# Altium PCB Mother_board_sauvc_2025.PcbDoc
Units mm, origin at the board's own origin, x right, y up, seen from the top; angles counter-clockwise.
Board outline 92.33 x 96.52 mm, 4 copper layers (Top Layer 1, VCC, GND, Bottom Layer 1), stack 0.603 mm thick; 75 components, 90 nets, 407 pads, 46 vias.
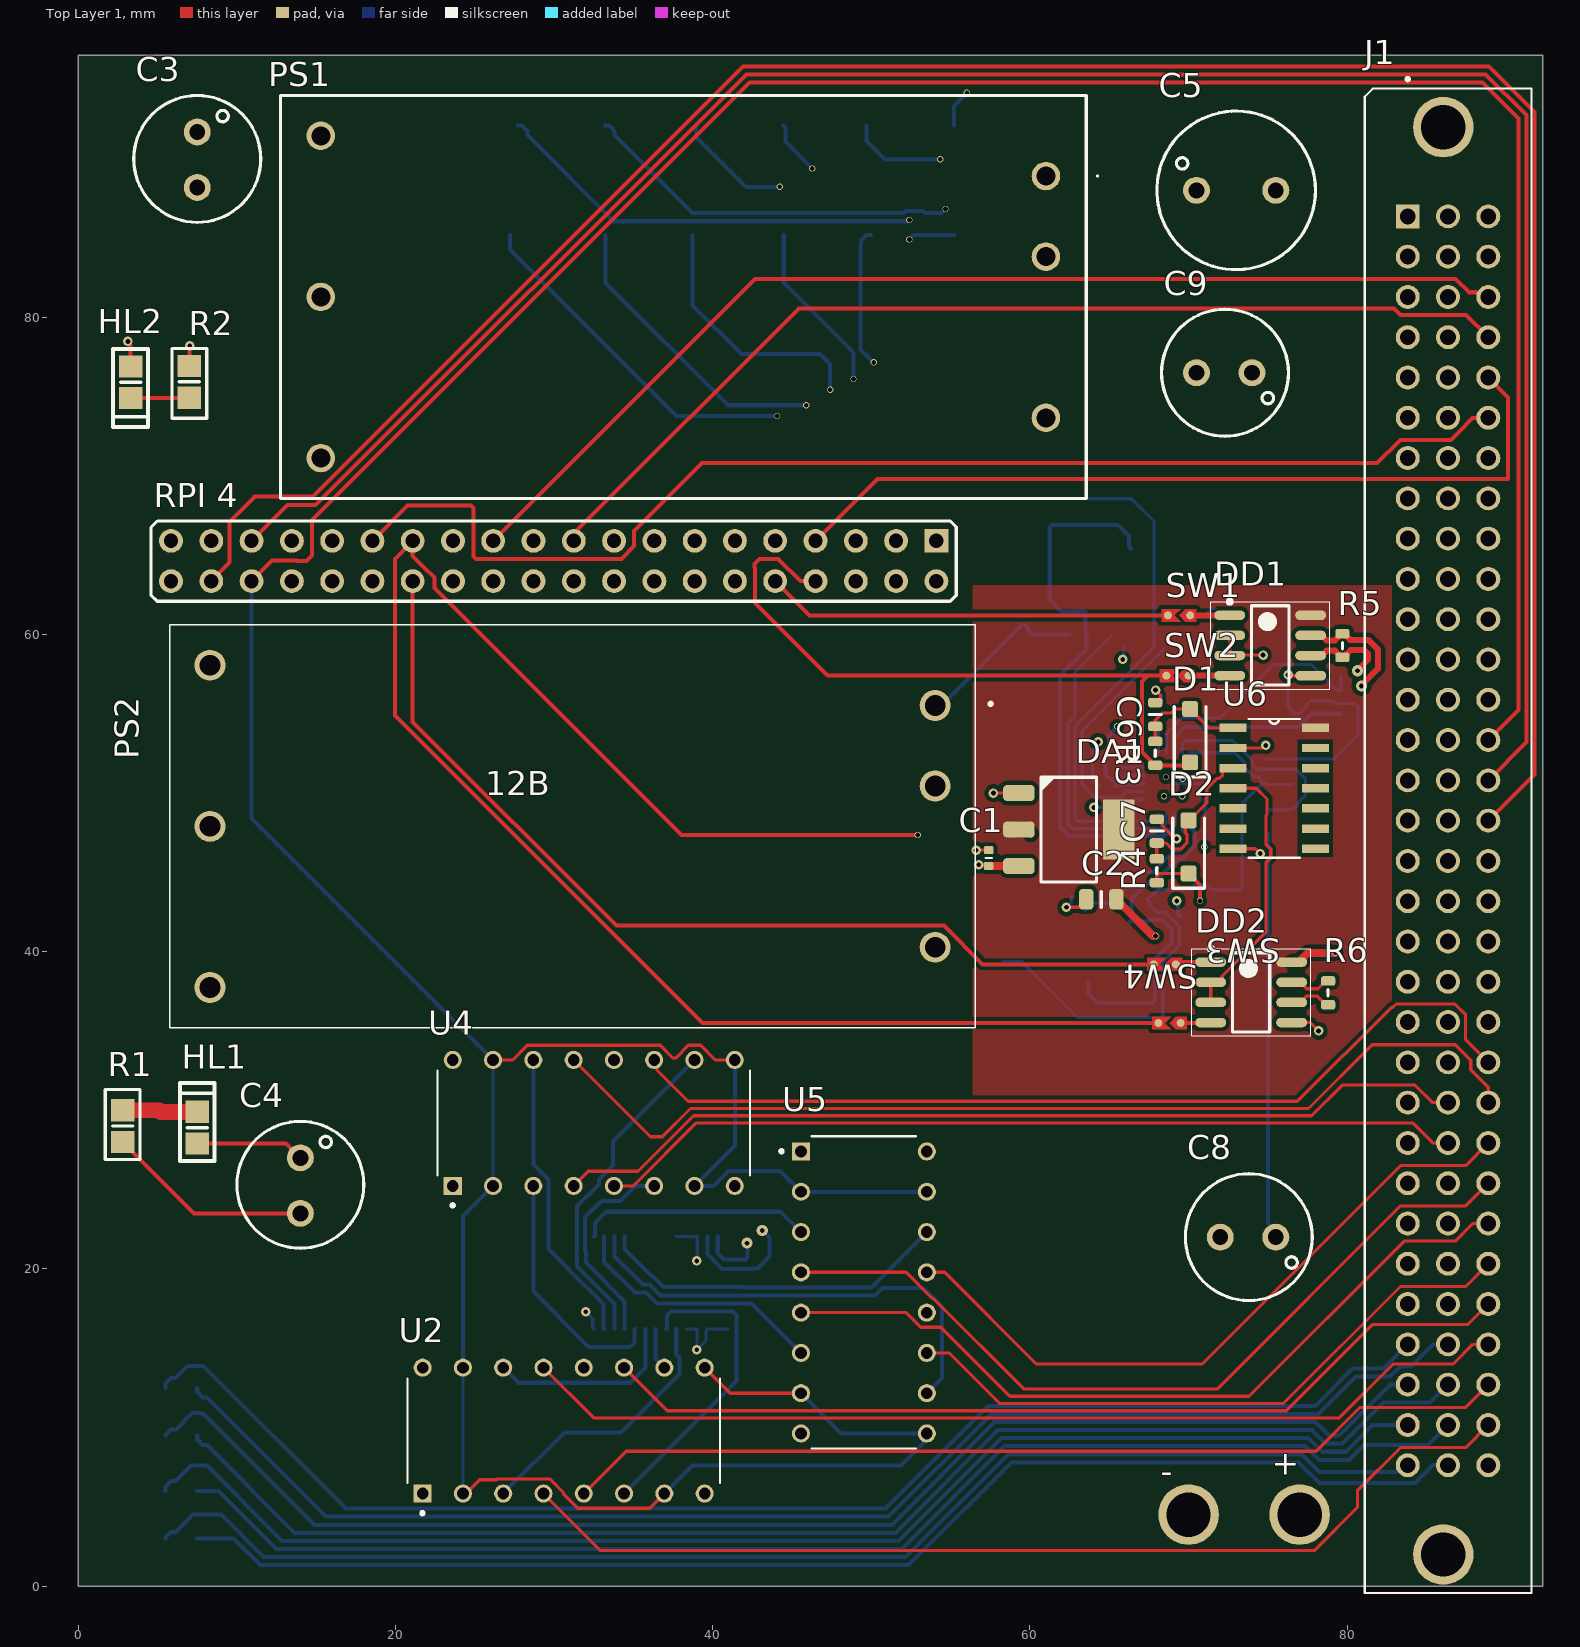
[diagram p0: Top Layer 1 view]
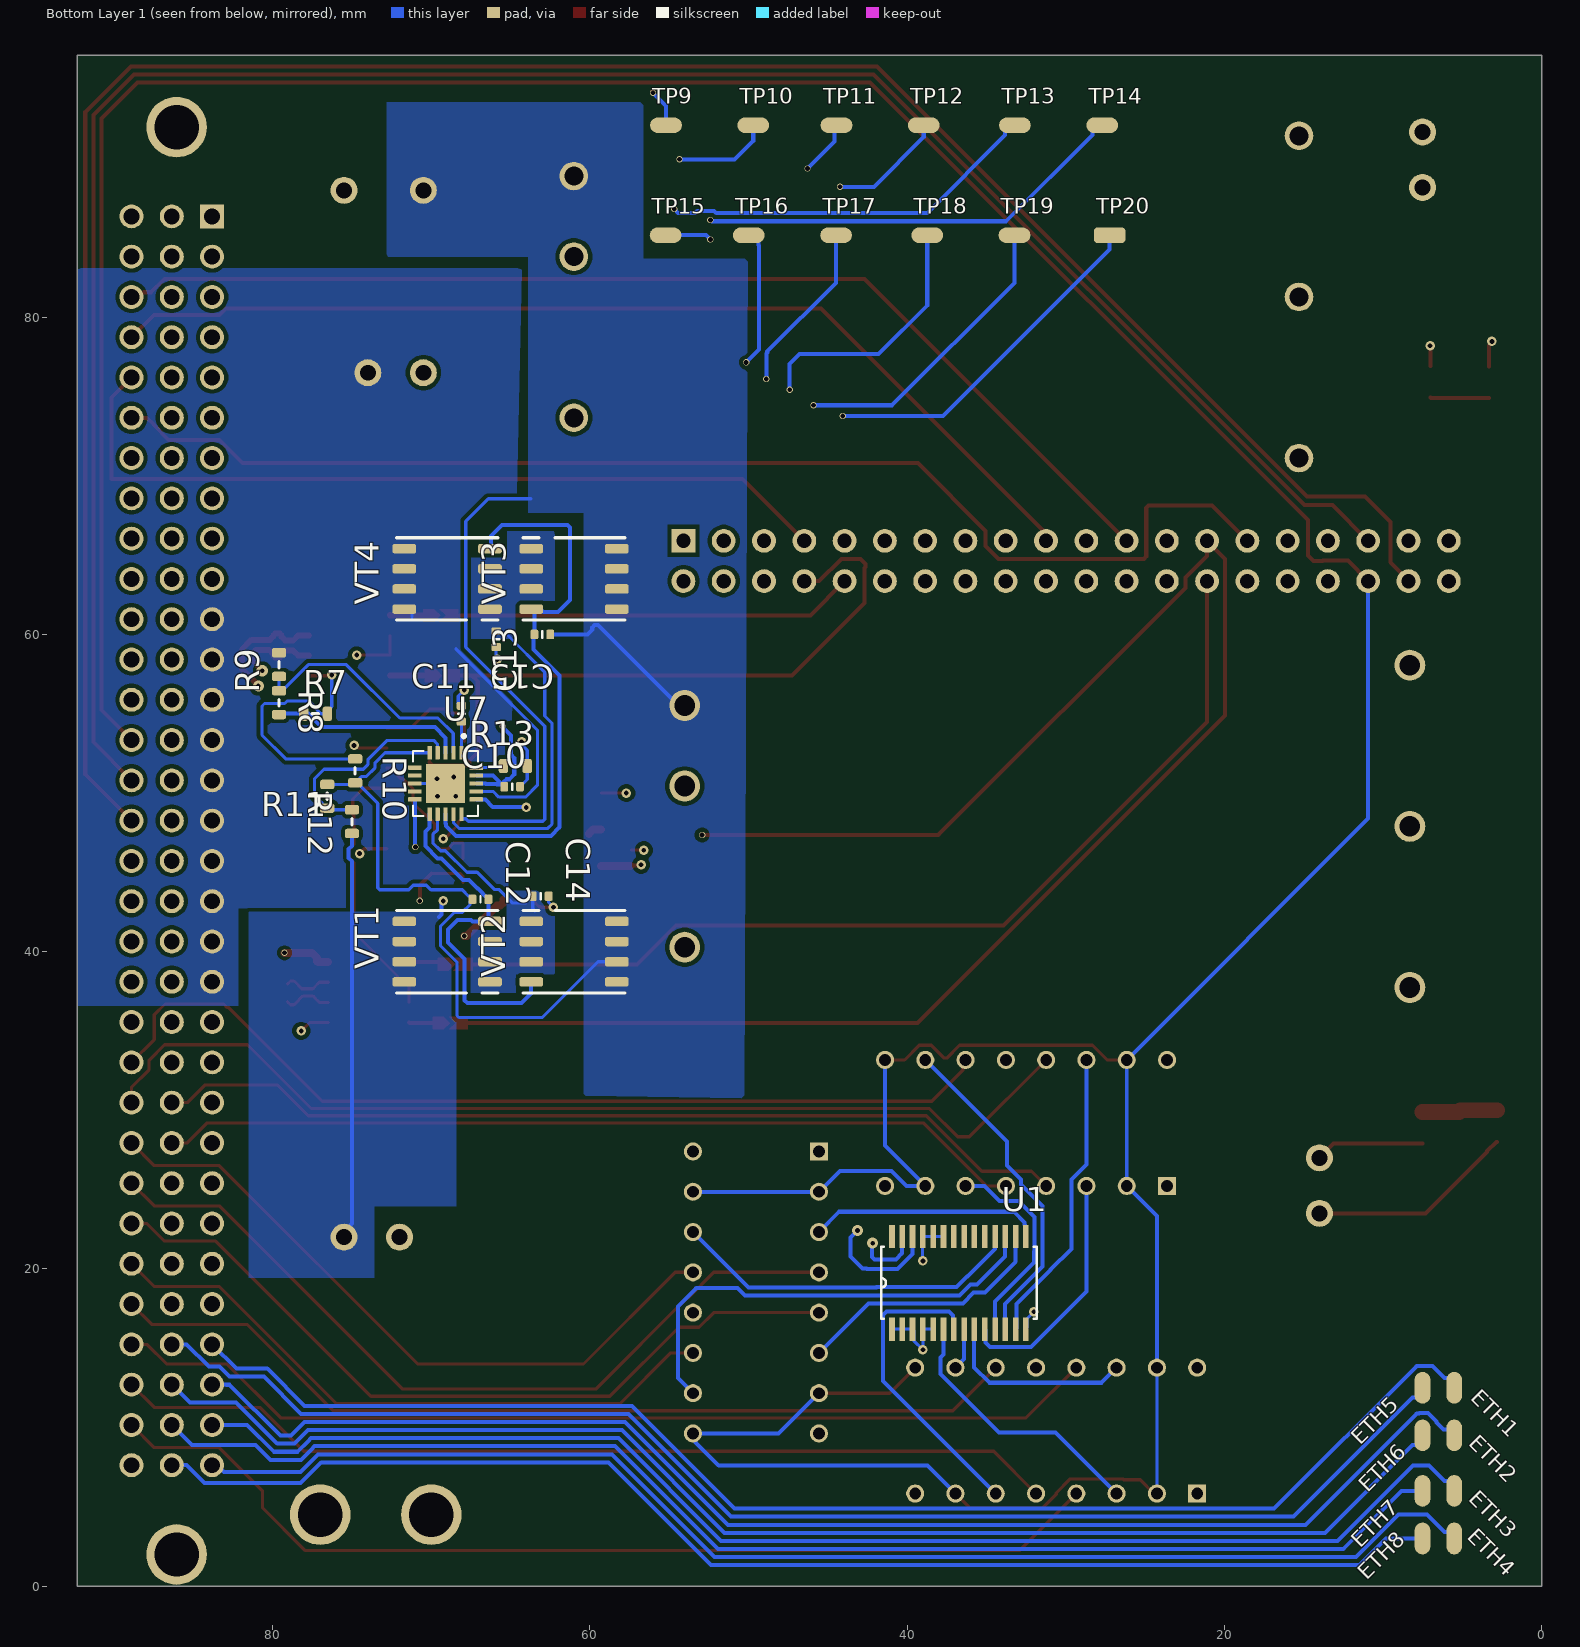
[diagram p1: Bottom Layer 1 view, seen from below]
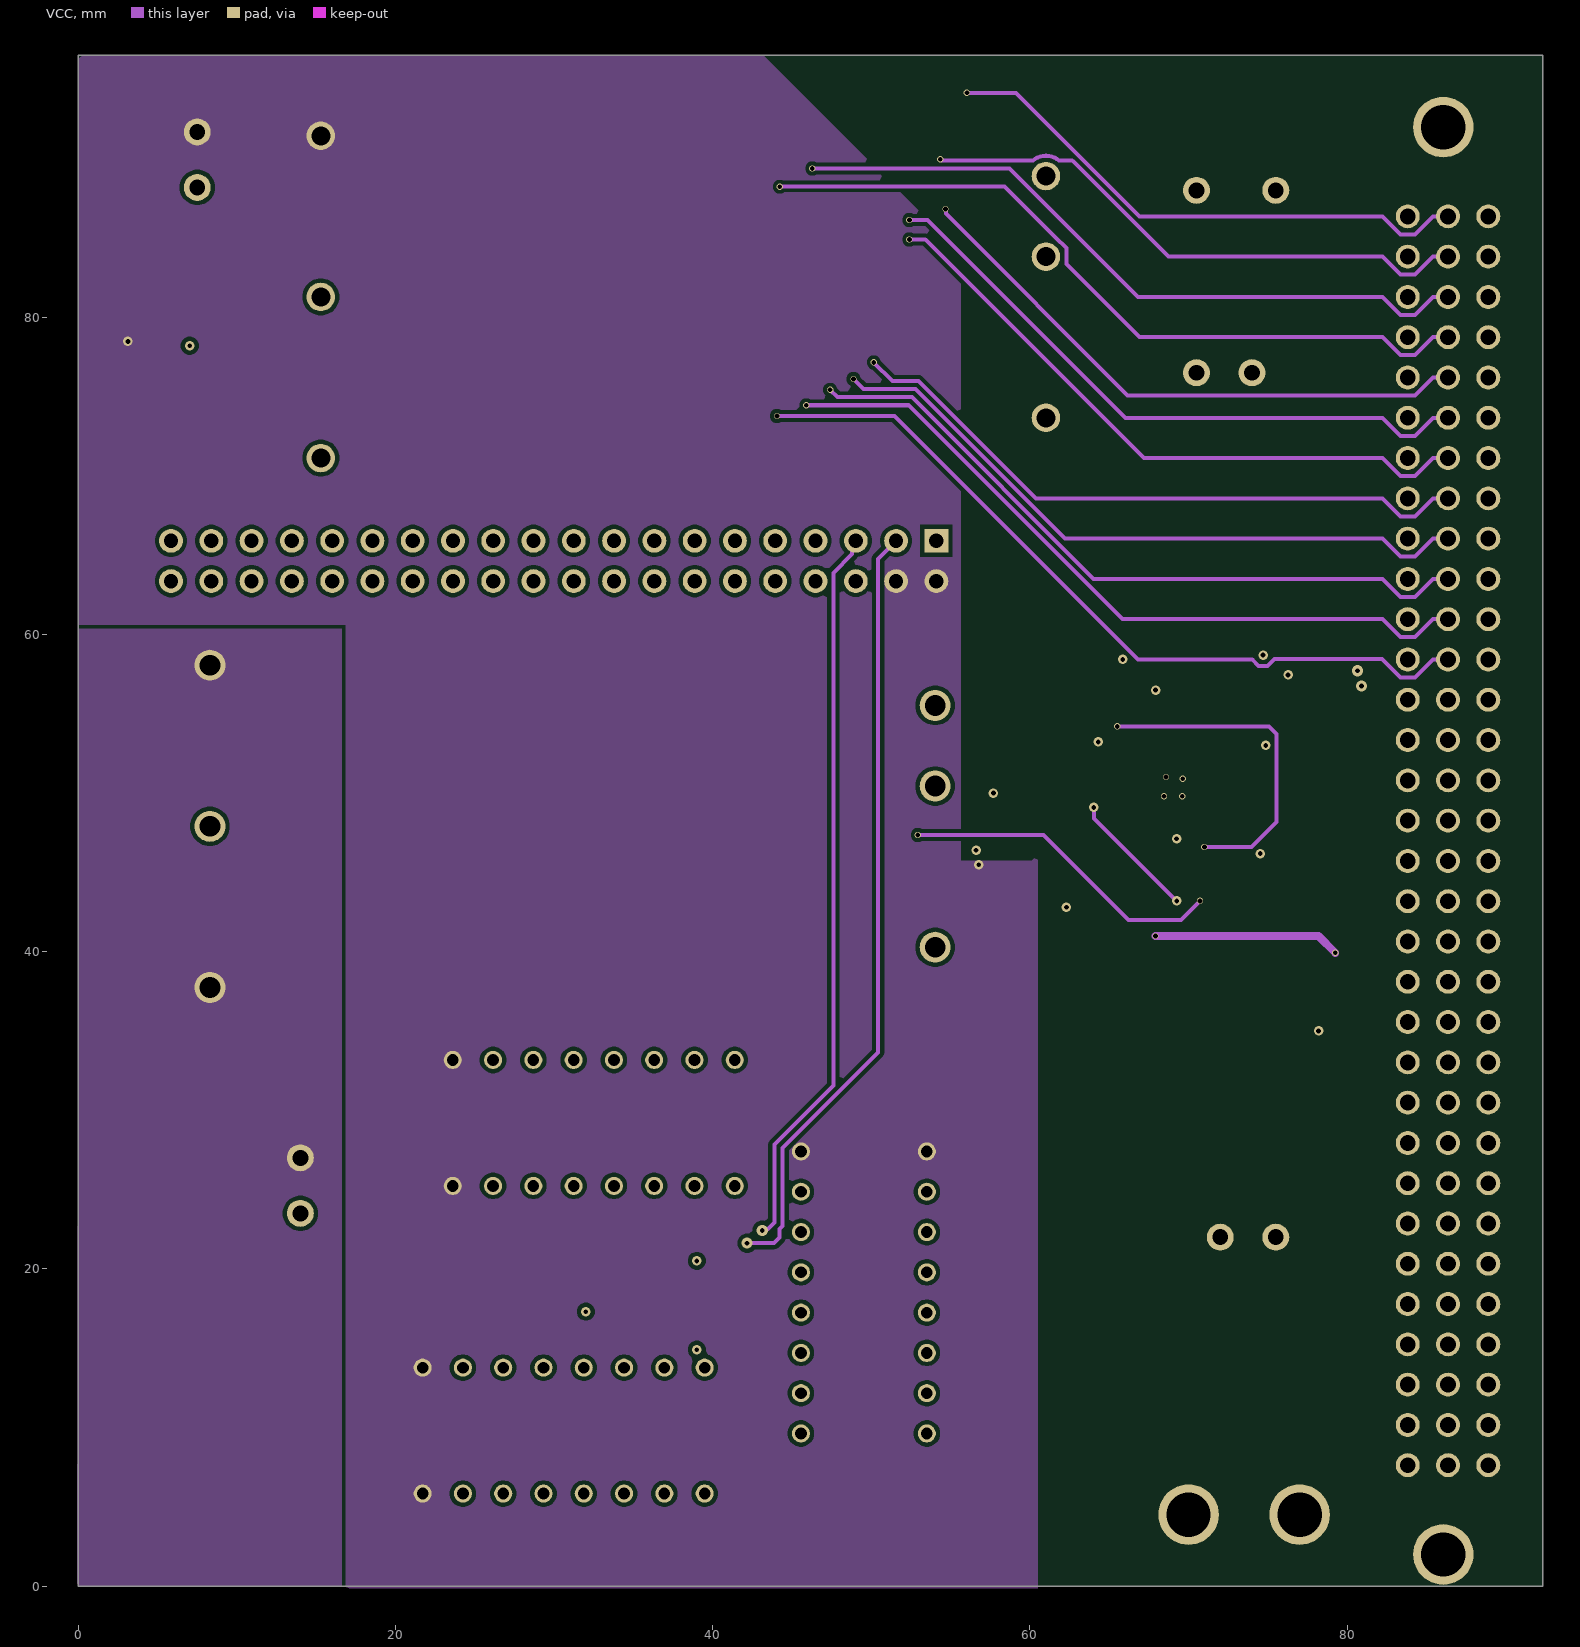
[diagram p2: VCC]
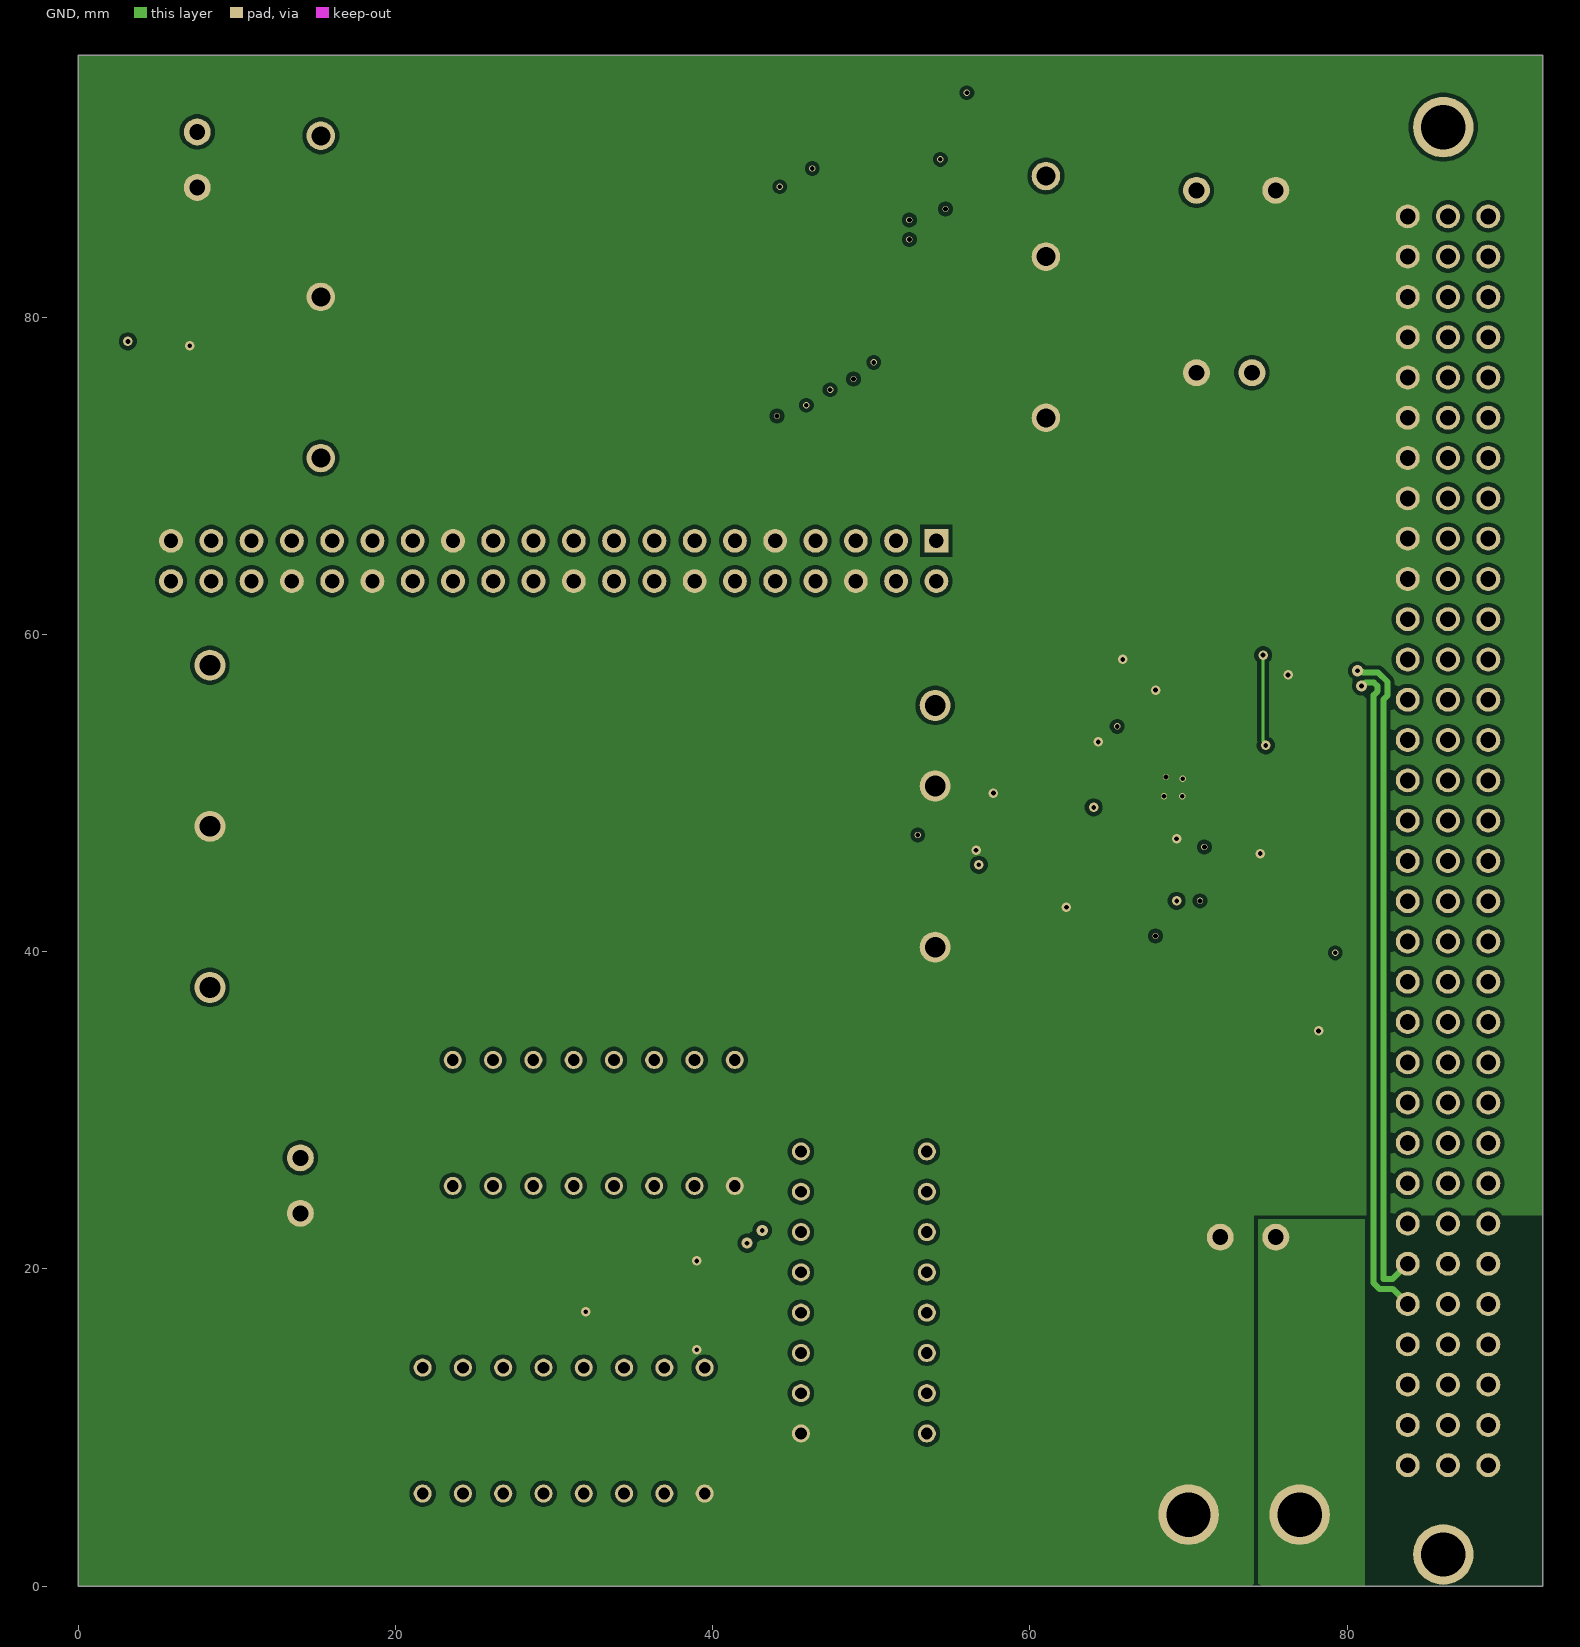
[diagram p3: GND]

## Layer stack, top to bottom
Top Solder: solder mask 0.0102, Solder Resist, Dk 3.5
Top Layer 1: signal copper 0.035
Dielectric 2: prepreg 0.0711, PP-006, Dk 4.1
VCC: signal copper 0.0356
Dielectric 1: dielectric 0.32, FR-4, Dk 4.8
GND: signal copper 0.0356
Dielectric 3: prepreg 0.0711, PP-006, Dk 4.1
Bottom Layer 1: signal copper 0.035
Bottom Solder: solder mask 0.0102, Solder Resist, Dk 3.5

## Board outline
0,0 92.329,0 92.329,96.52 0,96.52

## Design rules (kind name [scope] priority, off if disabled: settings)
Clearance [All] p1: gap=0.254 ignorepadtopadclearanceinfootprint=FALSE
DiffPairsRouting DiffPairsRouting_1 [InDifferentialPair('RS485_2')] p1: maxlimit=0.254 minlimit=0.2 mostfreqgap=0.254 toplayer_minwidth=0.2 toplayer_maxwidth=0.381 toplayer_prefwidth=0.381 midlayer1_minwidth=0.2 midlayer1_maxwidth=0.381 midlayer1_prefwidth=0.381 midlayer2_minwidth=0.2 midlayer2_maxwidth=0.381 midlayer2_prefwidth=0.381 bottomlayer_minwidth=0.2 bottomlayer_maxwidth=0.381 bottomlayer_prefwidth=0.381 maxuncoupledlength=12.7
DiffPairsRouting [InDifferentialPair('RS485')] p2: maxlimit=0.254 minlimit=0.254 mostfreqgap=0.254 toplayer_minwidth=0.381 toplayer_maxwidth=0.381 toplayer_prefwidth=0.381 midlayer1_minwidth=0.381 midlayer1_maxwidth=0.381 midlayer1_prefwidth=0.381 midlayer2_minwidth=0.381 midlayer2_maxwidth=0.381 midlayer2_prefwidth=0.381 bottomlayer_minwidth=0.381 bottomlayer_maxwidth=0.381 bottomlayer_prefwidth=0.381 maxuncoupledlength=12.7
PlaneConnect PlaneConnect_1 [InNetClass('Power')] p1: pad.planeconnectstyle=Direct pad.reliefexpansion=0.508 pad.reliefentries=4 pad.reliefconductorwidth=0.254 pad.reliefairgap=0.254 via.planeconnectstyle=Relief via.reliefexpansion=0.508 via.reliefentries=4 via.reliefconductorwidth=0.254 via.reliefairgap=0.254
PlaneConnect [InNetClass('All Nets')] p2: planeconnectstyle=Direct reliefexpansion=0.508 reliefentries=4 reliefconductorwidth=0.254 reliefairgap=0.254
PolygonConnect PolygonConnect_6 [All vs IsNamedPolygon('NONET_L-01_P-001')] p1: connectstyle=Direct reliefconductorwidth=0.254 reliefentries=4 polygonreliefangle="90 Angle" airgapwidth=0.254
PolygonConnect PolygonConnect_5 [All vs IsNamedPolygon('NONET_L-01_P-001')] p2: connectstyle=Direct reliefconductorwidth=0.254 reliefentries=4 polygonreliefangle="90 Angle" airgapwidth=0.254
PolygonConnect PolygonConnect_4 [All vs IsNamedPolygon('NONET_L-01_P-001')] p3: connectstyle=Direct reliefconductorwidth=0.254 reliefentries=4 polygonreliefangle="90 Angle" airgapwidth=0.254
PolygonConnect PolygonConnect_3 [All vs IsNamedPolygon('NONET_L-01_P-001')] p4: connectstyle=Direct reliefconductorwidth=0.254 reliefentries=4 polygonreliefangle="90 Angle" airgapwidth=0.254
PolygonConnect PolygonConnect_2 [All vs IsNamedPolygon('NONET_L-01_P-001')] p5: connectstyle=Direct reliefconductorwidth=0.254 reliefentries=4 polygonreliefangle="90 Angle" airgapwidth=0.254
PolygonConnect PolygonConnect_1 [All vs IsNamedPolygon('NONET_L01_P000')] p6: thpad.connectstyle=Direct thpad.reliefconductorwidth=0.254 thpad.reliefentries=4 thpad.polygonreliefangle="90 Angle" thpad.airgapwidth=0.254 smdpad.connectstyle=Relief smdpad.reliefconductorwidth=0.254 smdpad.reliefentries=4 smdpad.polygonreliefangle="90 Angle" smdpad.airgapwidth=0.254 via.connectstyle=Direct via.reliefconductorwidth=0.254 via.reliefentries=4 via.polygonreliefangle="90 Angle" via.airgapwidth=0.254
PolygonConnect [All] p7: connectstyle=Relief reliefconductorwidth=0.254 reliefentries=4 polygonreliefangle="90 Angle" airgapwidth=0.254
RoutingTopology [InNetClass('PWM[1..12]')] p1: topology=Starburst
RoutingVias [All] p1: holewidth=0.711 width=1.27 viastyle="Through Hole" minholewidth=0.711 minwidth=1.27 maxholewidth=0.711 maxwidth=1.27
SolderMaskExpansion [All] p1: expansion=0.102 istentingtop=FALSE
Width Width_power [InNetClass('Power')] p1: maxlimit=3 minlimit=0.254 preferedwidth=0.5
Width Width_signals [InNetClass('Signals')] p2: maxlimit=1 minlimit=0.2 preferedwidth=0.5
Width Width_PWM [InNetClass('PWM[1..12]')] p3: maxlimit=1 minlimit=0.2 preferedwidth=0.5
27 further rules are at their usual default settings.

## Classes and differential pairs
component class Power_switch: C5 C8 C9 C10 C11 C12 C13 C14 C15 R7 R8 R9 R10 R11 R12 R13 U7 VT1 VT2 VT3 VT4
component class Power: C1 C2 C3 C4 DA1 HL1 HL2 PS1 PS2 R1 R2
component class Con: + - ETH1 ETH3 ETH4 ETH5 ETH6 ETH7 ETH8 J1 TP9 TP10 TP11 TP12 TP13 TP14 TP15 TP16 TP17 TP18 TP19 TP20
net class PWM[1..12]: PWM1 PWM2 PWM3 PWM4 PWM5 PWM6 PWM7 PWM8 PWM9 PWM10 PWM11 PWM12
component class RPI: C6 C7 D1 D2 DD1 DD2 R3 R4 R5 R6 "RPI 4" SW1 SW2 SW3 SW4 U1 U2 U4 U5 U6
differential pair RS485: +RS485_P -RS485_N
differential pair RS485_2: +RS485_2_P -RS485_2_N

## Components (designator, comment, footprint, x,y, rotation, side; value= is the part's Value field where it differs from the comment)
+ "TP" TP#1 77,4.5 r270 top
- "TP" TP#1 70,4.5 r270 top
C1 "100 nF" C0402C 57.4,45.9 r90 top
C2 "10 мкФ" C0805C 64.5,43.3 r180 top
C3 "1uF" "Capacitor 8x12" 7.5,91.68 r270 top value=1000uF
C4 "1uF" "Capacitor 8x12" 14,27 r270 top value=220uF
C5 "1uF" "Capacitor 10x12" 70.5,88 r0 top value=1000uF
C6 "0,1мкФ" C0603C 67.9,54.95 r90 top
C7 "0,1мкФ" C0603C 68,47.6 r90 top
C8 "1uF" "Capacitor 8x12" 75.5,22 r180 top value=10uF
C9 "1uF" "Capacitor 8x12" 74,76.5 r180 top value=10uF
C10 "0,1 мкФ" C0402C 64.9,50.4 r180 bottom
C11 "10 нФ" C0402C 68.1,55 r90 bottom
C12 "0,1 мкФ" C0402C 66.9,43.3 r180 bottom
C13 "0,1 мкФ" C0402C 63,60 r0 bottom
C14 "0,1 мкФ" C0402C 63.1,43.5 r180 bottom
C15 "0,1 мкФ" C0402C 65.9,59.7 r270 bottom
D1 "Diode" SOD-123F 70.1,53.615 r90 top
D2 "Diode" SOD-123F 70,46.6 r90 top
DA1 "LD1117S33TR" SOT-223 65.6,47.7 r270 top
DD1 "Value" SOIC8N 75.15,59.305 r0 top
DD2 "Value" SOIC8N 73.95,37.435 r0 top
ETH1 "TP" TP#2 5.5,12.5 r180 top (schematic designator TP1)
ETH2 "TP" TP#2 5.5,9.5 r180 top (schematic designator TP2)
ETH3 "TP" TP#2 5.5,6 r180 top (schematic designator TP3)
ETH4 "TP" TP#2 5.5,3 r180 top (schematic designator TP4)
ETH5 "TP" TP#2 7.5,12.5 r180 top (schematic designator TP5)
ETH6 "TP" TP#2 7.5,9.5 r180 top (schematic designator TP6)
ETH7 "TP" TP#2 7.5,6 r180 top (schematic designator TP7)
ETH8 "TP" TP#2 7.5,3 r180 top (schematic designator TP8)
HL1 "Value" 0805D 7.4,28.8 r90 top
HL2 "Value" 0805D 3.4,76 r270 top
J1 "DIN96SBSPF" CINCH_DIN96SBSPF 86.36,46.99 r90 top
PS1 "SKM30A-05" SKM30A05 61.01,88.9 r180 top locked
PS2 "SKM30A-12" SKM30B12 54.02,55.52 r180 top
R1 "Resistor" 0805R 2.7,28.9 r90 top value=9.1кОм
R2 "Resistor" 0805R 7.1,76.027 r270 top value=2кОм
R3 "22 к" C0603R 67.9,52.5 r90 top
R4 "22 к" C0603R 68,45.1 r90 top
R5 "120" C0603R 79.7,59.3 r270 top
R6 "120" C0603R 78.8,37.4 r270 top
R7 "10K" C0603R 77.3,55 r180 bottom value="59 к"
R8 "10K" C0603R 79.6,55.7 r270 bottom value="59 к"
R9 "160K" C0603R 79.6,58.1 r270 bottom value="59 к"
R10 "10K" C0603R 74.8,51.4 r90 bottom value="59 к"
R11 "10K" C0603R 76.561,49.789 r90 bottom value="59 к"
R12 "160K" C0603R 75,48.2 r90 bottom value="59 к"
R13 "160K" C0603R 64.7,51.7 r180 bottom value="59 к"
"RPI 4" "RASPBERRY_PI_4B_4GB" PLD40 54.1,65.9 r270 top (schematic designator U3)
SW1 "SW2" SW2 68.7,61.2 r0 top
SW2 "SW2" SW2 68.6,57.4 r0 top
SW3 "SW2" SW2 67.8,39.2 r0 top
SW4 "SW2" SW2 68.1,35.5 r0 top
TP9 "TP" TP#3 55.2,92.1 r270 bottom
TP10 "TP" TP#3 49.7,92.1 r270 bottom
TP11 "TP" TP#3 44.45,92.1 r270 bottom
TP12 "TP" TP#3 38.95,92.1 r270 bottom
TP13 "TP" TP#3 33.2,92.1 r270 bottom
TP14 "TP" TP#3 27.7,92.1 r270 bottom
TP15 "TP" TP#3 55.228,85.17 r270 bottom
TP16 "TP" TP#3 49.979,85.17 r270 bottom
TP17 "TP" TP#3 44.479,85.17 r270 bottom
TP18 "TP" TP#3 38.729,85.17 r270 bottom
TP19 "TP" TP#3 33.229,85.17 r270 bottom
TP20 "TP" TP#4 27.229,85.17 r270 bottom
U1 "PCA9685PW,118" SOP65P640X110-28N 36.735,19.121 r90 bottom
U2 "CD40109BE" DIP794W45P254L1969H508Q16 30.6,9.8 r90 top
U4 "CD40109BE" DIP794W45P254L1969H508Q16 32.5,29.2 r90 top
U5 "CD40109BE" DIP794W45P254L1969H508Q16 49.53,18.51 r0 top
U6 "" SOIC127P600X175-14N 75.4,50.3 r0 top
U7 "LTC4418IUF#TRPBF" QFN50P400X400X80-21N 69.1,50.6 r270 bottom
VT1 "IRF7240PBF" SOIC-8 69,40 r0 bottom
VT2 "IRF7240PBF" SOIC-8 61,40 r180 bottom
VT3 "IRF7240PBF" SOIC-8 61,63.5 r180 bottom
VT4 "IRF7240PBF" SOIC-8 69,63.5 r0 bottom

## Footprints (in the part's own frame and the unit in brackets; to place one, negate y for a bottom-side part, rotate by r counter-clockwise, add the part's x,y. Pads: shape width x height; smd on the part's side, far side on the other; paste and mask are expansions set on the pad)
0805D [mm]
  rect 1.4x1.5 smd: 1(-0.9,-0.1) 2(1.1,-0.1)
  silkscreen extent -2,-1.2 2.93,1, body extent -1.5,-0.9 1.7,0.7, height 1.11
0805R [mm]
  rect 1.4x1.5 smd: 1(-0.9,-0.1) 2(1.1,-0.1)
  silkscreen extent -2,-1.2 2.4,1, body extent -0.9,-0.7 1.1,0.5, height 0.5
C0402C [mm]
  rrect40% 0.5x0.6 smd: 1(-0.5,0) 2(0.5,0)
  silkscreen extent 0,-0.2 0,0.2, body extent -0.5,-0.25 0.5,0.25, height 0.55
C0603C [mm]
  rrect50% 0.6x0.9 smd: 1(-0.75,0) 2(0.75,0)
  silkscreen extent 0,-0.4 0,0.4, body extent -0.8,-0.4 0.8,0.4, height 0.95
C0603R [mm]
  rrect50% 0.6x0.9 smd: 1(-0.75,0) 2(0.75,0)
  silkscreen extent -0.2,0 0.2,0, body extent -0.8,-0.4 0.8,0.4, height 0.44
C0805C [mm]
  rrect50% 0.9x1.3 smd: 1(-0.95,0) 2(0.95,0)
  silkscreen extent 0,-0.5 0,0.5, body extent -1,-0.63 1,0.62, height 1
"Capacitor 8x12" [mm]
  round 1.7 hole 1: 1(0,0) 2(3.5,0)
  silkscreen extent -2.3,-4 5.7,4, body extent -2.3,-4.1 5.7,3.9, height 12.5
"Capacitor 10x12" [mm]
  round 1.7 hole 1: 1(0,0) 2(5,0)
  silkscreen extent -2.5,-5 7.5,5, body extent -2.5,-5 7.5,5, height 12.5
CINCH_DIN96SBSPF [mm]
  rect 1.508x1.508 / inner round 1.508 / far side rect 1.508x1.508 hole 1: A1(39.37,2.54)
  round 1.508 hole 1: A2(36.83,2.54) A3(34.29,2.54) A4(31.75,2.54) A5(29.21,2.54) A6(26.67,2.54) A7(24.13,2.54) A8(21.59,2.54) A9(19.05,2.54) A10(16.51,2.54) A11(13.97,2.54) A12(11.43,2.54) A13(8.89,2.54) A14(6.35,2.54) A15(3.81,2.54) A16(1.27,2.54) A17(-1.27,2.54) A18(-3.81,2.54) A19(-6.35,2.54) A20(-8.89,2.54) A21(-11.43,2.54) A22(-13.97,2.54) A23(-16.51,2.54) A24(-19.05,2.54) A25(-21.59,2.54) A26(-24.13,2.54) A27(-26.67,2.54) A28(-29.21,2.54) A29(-31.75,2.54) A30(-34.29,2.54) A31(-36.83,2.54) A32(-39.37,2.54) B1(39.37,0) B2(36.83,0) B3(34.29,0) B4(31.75,0) B5(29.21,0) B6(26.67,0) B7(24.13,0) B8(21.59,0) B9(19.05,0) B10(16.51,0) B11(13.97,0) B12(11.43,0) B13(8.89,0) B14(6.35,0) B15(3.81,0) B16(1.27,0) B17(-1.27,0) B18(-3.81,0) B19(-6.35,0) B20(-8.89,0) B21(-11.43,0) B22(-13.97,0) B23(-16.51,0) B24(-19.05,0) B25(-21.59,0) B26(-24.13,0) B27(-26.67,0) B28(-29.21,0) B29(-31.75,0) B30(-34.29,0) B31(-36.83,0) B32(-39.37,0) C1(39.37,-2.54) C2(36.83,-2.54) C3(34.29,-2.54) C4(31.75,-2.54) C5(29.21,-2.54) C6(26.67,-2.54) C7(24.13,-2.54) C8(21.59,-2.54) C9(19.05,-2.54) C10(16.51,-2.54) C11(13.97,-2.54) C12(11.43,-2.54) C13(8.89,-2.54) C14(6.35,-2.54) C15(3.81,-2.54) C16(1.27,-2.54) C17(-1.27,-2.54) C18(-3.81,-2.54) C19(-6.35,-2.54) C20(-8.89,-2.54) C21(-11.43,-2.54) C22(-13.97,-2.54) C23(-16.51,-2.54) C24(-19.05,-2.54) C25(-21.59,-2.54) C26(-24.13,-2.54) C27(-26.67,-2.54) C28(-29.21,-2.54) C29(-31.75,-2.54) C30(-34.29,-2.54) C31(-36.83,-2.54) C32(-39.37,-2.54)
  round 3.816 hole 2.8: SH1(-45,0.3) SH2(45,0.3)
  silkscreen extent -47.42,-5.25 48.12,5.25
DIP794W45P254L1969H508Q16 [mm]
  rect 1.14x1.14 / inner round 1.14 / far side rect 1.14x1.14 hole 0.74: 1(-3.97,8.89)
  round 1.14 hole 0.74: 2(-3.97,6.35) 3(-3.97,3.81) 4(-3.97,1.27) 5(-3.97,-1.27) 6(-3.97,-3.81) 7(-3.97,-6.35) 8(-3.97,-8.89) 9(3.97,-8.89) 10(3.97,-6.35) 11(3.97,-3.81) 12(3.97,-1.27) 13(3.97,1.27) 14(3.97,3.81) 15(3.97,6.35) 16(3.97,8.89)
  silkscreen extent -5.3,-9.85 3.3,9.85, body extent -3.95,-10.67 3.95,10.67, height 5.08
PLD40 [mm]
  rect 1.5x1.5 hole 0.9: 1(0,0)
  round 1.5 hole 0.9: 2(2.54,0) 3(0,-2.54) 4(2.54,-2.54) 5(0,-5.08) 6(2.54,-5.08) 7(0,-7.62) 8(2.54,-7.62) 9(0,-10.16) 10(2.54,-10.16) 11(0,-12.7) 12(2.54,-12.7) 13(0,-15.24) 14(2.54,-15.24) 15(0,-17.78) 16(2.54,-17.78) 17(0,-20.32) 18(2.54,-20.32) 19(0,-22.86) 20(2.54,-22.86) 21(0,-25.4) 22(2.54,-25.4) 23(0,-27.94) 24(2.54,-27.94) 25(0,-30.475) 26(2.54,-30.475) 27(0,-33.015) 28(2.54,-33.015) 29(0,-35.555) 30(2.54,-35.555) 31(0,-38.095) 32(2.54,-38.095) 33(0,-40.635) 34(2.54,-40.635) 35(0,-43.175) 36(2.54,-43.175) 37(0,-45.715) 38(2.54,-45.715) 39(0,-48.255) 40(2.54,-48.255)
  silkscreen extent -1.25,-49.51 3.81,1.25, body extent -1.27,-49.53 3.81,1.27, height 8.44
QFN50P400X400X80-21N [mm]
  rrect25% 0.86x0.27 smd: 1(-1.935,1) 2(-1.935,0.5) 3(-1.935,0) 4(-1.935,-0.5) 5(-1.935,-1) 11(1.935,-1) 12(1.935,-0.5) 13(1.935,0) 14(1.935,0.5) 15(1.935,1)
  rrect25% 0.27x0.86 smd: 6(-1,-1.935) 7(-0.5,-1.935) 8(0,-1.935) 9(0.5,-1.935) 10(1,-1.935) 16(1,1.935) 17(0.5,1.935) 18(0,1.935) 19(-0.5,1.935) 20(-1,1.935)
  rect 2.45x2.45 smd paste-2: 21(0,0)
  silkscreen extent -3.09,-2.05 2.05,2.05
SKM30A05 [mm]
  round 1.8 hole 1.2: 1(0,0) 2(0,5.08) 3(0,15.24) 4(45.72,-2.54) 5(45.72,7.62) 6(45.72,17.78)
  silkscreen extent -3.3,-5.08 48.26,20.32, body extent -2.54,-5.08 48.26,20.32, height 11.3
SKM30B12 [mm]
  round 1.95 hole 1.3: 1(0,0) 2(0,5.08) 3(0,15.24) 4(45.72,-2.54) 5(45.72,7.62) 6(45.72,17.78)
  silkscreen extent -3.6,-5.08 48.26,20.32, body extent -2.54,-5.08 48.26,20.32, height 11.3
SOD-123F [mm] "SMD"
  rrect30% 1x1 smd: A(1.675,0) K(-1.675,0)
  silkscreen extent -2.6,-1 1.83,1, body extent -1.9,-0.8 1.9,0.8, height 1
SOIC8N [mm] "SOIC, 8-Leads, Body 4,90x3,90mm, Pitch 1,27mm, IPC Medium Density"
  oval 1.95x0.6 smd: 1(-2.55,1.905) 2(-2.55,0.635) 3(-2.55,-0.635) 4(-2.55,-1.905) 5(2.55,-1.905) 6(2.55,-0.635) 7(2.55,0.635) 8(2.55,1.905)
  silkscreen extent -3.75,-2.75 3.75,2.88, body extent -2,-2.5 2,2.5, height 1.75
SOIC127P600X175-14N [mil]
  rect 67x21 smd: 1(-102,150) 2(-102,100) 3(-102,50) 4(-102,0) 5(-102,-50) 6(-102,-100) 7(-102,-150) 8(102,-150) 9(102,-100) 10(102,-50) 11(102,0) 12(102,50) 13(102,100) 14(102,150)
  silkscreen extent -63,-172 63,172, body extent -118,-170 118,170, height 69
SOIC-8 [mm]
  rrect50% 1.5x0.6 smd: 1(-2.7,1.905) 2(-2.7,0.635) 3(-2.7,-0.635) 4(-2.7,-1.905) 5(2.7,-1.905) 6(2.7,-0.635) 7(2.7,0.635) 8(2.7,1.905)
  silkscreen extent -3.2,-2.6 3.2,2.6, body extent -3,-2.45 3,2.45, height 1.75
SOP65P640X110-28N [mil]
  rect 58x14 smd: 1(-115,166) 2(-115,141) 3(-115,115) 4(-115,90) 5(-115,64) 6(-115,38) 7(-115,13) 8(-115,-13) 9(-115,-38) 10(-115,-64) 11(-115,-90) 12(-115,-115) 13(-115,-141) 14(-115,-166) 15(115,-166) 16(115,-141) 17(115,-115) 18(115,-90) 19(115,-64) 20(115,-38) 21(115,-13) 22(115,13) 23(115,38) 24(115,64) 25(115,90) 26(115,115) 27(115,141) 28(115,166)
  silkscreen extent -89,-193 89,193
SOT-223 [mm]
  rrect50% 1x2 smd: 1(-2.3,-6.3) 2(0,-6.3) 3(2.3,-6.3)
  rrect10% 3.8x2 smd: 4(0,0)
  silkscreen extent -3.3,-4.9 3.3,-1.4, body extent -3.25,-6.6 3.25,0.4, height 1.8
SW2 [mm]
  round 0.5 smd paste+0 mask+0: 1(0,0) 2(1.4,0)
  Top Layer 1 region: -0.4,0.4 -0.4,-0.4 0.8,-0.4 0.4,0 0.8,0.4
  Top Layer 1 region: 1.1,0.4 0.7,0 1.1,-0.4 1.8,-0.4 1.8,0.4
TP#1 [mm]
  round 3.816 hole 2.8: 1(0,0)
TP#2 [mm]
  oval 1x2 smd far side: 1(0,0)
TP#3 [mm]
  oval 1x2 smd: 1(0,0)
TP#4 [mm]
  rrect50% 1x2 smd: 1(0,0)

## Part data
+ - ETH1 ETH2 ETH3 ETH4 ETH5 ETH6 ETH7 ETH8 TP9 TP10 TP11 TP12 TP13 TP14 TP15 TP16 TP17 TP18 TP19 TP20: "Test point"
C1: library part CL05B103KA5NNNC, "SMD 0603 ; X7R; 0,01 мкФ; 25 В", Dielectric=X7R, Manufacturer=SAMSUNG, Package="SMD 0402", Voltage="25 В", ComponentLink1Description=Datasheet, Part Number=CL05B103KA5NNNC, Persent=±10%, Type=Ceramic
C2: library part CL21B106KOQNNNE, "SMD 0805; X7R; 10 мкФ; 16 В", Dielectric=X7R, Manufacturer=SAMSUNG, Package="SMD 0805", Voltage="16 В", ComponentLink1Description=Datasheet, Part Number=CL21B106KOQNNNE, Persent=±15%, Type=Ceramic
C3 C4 C5 C8 C9: library part Capacitor_pol
C6 C7: library part CL10B152KB8NNNC, "SMD 0603 ; X7R; 1,5 нФ; 50 В", Dielectric=X7R, Manufacturer=SAMSUNG, Package="SMD 0603", Voltage="16 В", ComponentLink1Description=Datasheet, Part Number=CL10B152KB8NNNC, Persent=±15%, Type=Ceramic
C10 C11 C12 C13 C14 C15: library part CL05B104KA5NNNC, "SMD 0402 ; X7R; 0,1 мкФ; 25 В", Dielectric=X7R, Manufacturer=SAMSUNG, Package="SMD 0402", Voltage="25 В", ComponentLink1Description=Datasheet, Part Number=CL05B104KA5NNNC, Persent=±10%, Type=Ceramic
D1 D2: library part Schottky-Diode, Datasheet=https://diotec.com/de/produktliste/SBD.html, ki_description="Schottky Diode", ki_keywords=Schottky
DA1: "Linear regulator, 3V3", Manufacturer=STMicroelectronics, Part Number=LD1117S33TR, Type="Linear regulator"
DD1 DD2: library part MAX3072E, "Half-duplex", Case="soic-8(0.154 inch)", Manufacturer=MAXIM, Datasheet=https://static.chipdip.ru/lib/276/DOC000276899.pdf, Notice="True fail-safe", Rate=3.3v, Shop=https://www.chipdip.ru/product/max3072eesa
HL1: library part LED, Case=-, Color=зеленый, Datasheet=-, Manufacturer=-, Notice=-, Rate=-, Shop=-
HL2: library part LED, Case=-, Color=красный, Datasheet=-, Manufacturer=-, Notice=-, Rate=-, Shop=-
J1: "DIN 41612 socket, fully populated, 96 contacts, straight PCB mounted, press-fit pins", Package=None, Availability="In Stock", Check_prices=https://www.snapeda.com/parts/DIN96SBSPF/Cinch+Connectivity+Solutions/view-part/?ref=eda, MF="Cinch Connectivity Solutions", MP=DIN96SBSPF, Price=None, Purchase-URL=https://pricing.snapeda.com/search?q=DIN96SBSPF&ref=eda, SnapEDA_Link=https://www.snapeda.com/parts/DIN96SBSPF/Cinch+Connectivity+Solutions/view-part/?ref=snap
PS1: "Power Supply", Manufacturer_Name="Mean Well", Mouser Part Number=709-SKM30A-05, Datasheet Link=https://www.meanwell.com/webapp/product/search.aspx?prod=SKM30, Height=11.2mm, Manufacturer_Part_Number=SKM30A-05, Mouser Price/Stock=https://www.mouser.co.uk/ProductDetail/MEAN-WELL/SKM30A-05?qs=WtedIhRlNpsvgfTGPi4UAw%3D%3D
PS2: "Power Supply", Manufacturer_Name="Mean Well", Mouser Part Number=709-SKM30A-12, Arrow Part Number=SKM30A-12, Arrow Price/Stock=https://www.arrow.com/en/products/skm30a-12/mean-well-enterprises, Datasheet Link=https://www.meanwell.com/webapp/product/search.aspx?prod=SKM30, Height=11.2mm, Manufacturer_Part_Number=SKM30A-12, Mouser Price/Stock=https://www.mouser.co.uk/ProductDetail/MEAN-WELL/SKM30A-12?qs=WtedIhRlNpuG9wDURm5lSA%3D%3D
R3 R4: library part RC0603FR-0722KL, "SMD 0603; 0,1; 1%; 22 кОм", Manufacturer=Yageo, Package="SMD 0603", Power=0,1, Category=R, Part Number=RC0603FR-0722KL, Persent=1%, TCR="200 ppm"
R5 R6: library part RC0603FR-07120RL, "SMD 0603; 0,1; 1%; 120 Ом", Manufacturer=Yageo, Package="SMD 0603", Power=0,1, Category=R, Part Number=RC0603FR-07120RL, Persent=1%, TCR="200 ppm"
R7 R8 R9 R10 R11 R12 R13: library part RC0603FR-0759KL, "SMD 0603; 0,1; 1%; 59 кОм", Manufacturer=Yageo, Package="SMD 0603", Power=0,1, Category=R, Part Number=RC0603FR-0759KL, Persent=1%, TCR="200 ppm"
"RPI 4": "BCM2711 Raspberry Pi 4 Model B 4GB - ARMÂ® CortexÂ®-A72 MPU Embedded Evaluation Board", Package=None, Availability="In Stock", Check_prices=https://www.snapeda.com/parts/RASPBERRY%20PI%204B/4GB/Raspberry+Pi/view-part/?ref=eda, MF="Raspberry Pi", MP="RASPBERRY PI 4B/4GB", Price=None, Purchase-URL="https://pricing.snapeda.com/search/part/RASPBERRY PI 4B/4GB/?ref=eda", SnapEDA_Link=https://www.snapeda.com/parts/RASPBERRY%20PI%204B/4GB/Raspberry+Pi/view-part/?ref=snap
U1: "LED Driver IC 16 Output Linear - PWM Dimming 25mA 28-TSSOP", Package="TSSOP-28 NXP Semiconductors", Availability="In Stock", MF="NXP USA", MP=PCA9685PW,118, Price=None, Purchase-URL=https://pricing.snapeda.com/search/part/PCA9685PW,118/?ref=eda
U2 U4 U5: "Ð§ÐµÑ‚Ñ‹Ñ€ÐµÑ…ÑŠÑÐ´ÐµÑ€Ð½Ñ‹Ð¹ ÐšÐœÐžÐŸ-Ð¿Ñ€ÐµÐ¾Ð±Ñ€Ð°Ð·Ð¾Ð²Ð°Ñ‚ÐµÐ»ÑŒ Ð½Ð¸Ð·ÐºÐ¾Ð³Ð¾ Ð½Ð°Ð¿Ñ€ÑÐ¶ÐµÐ½Ð¸Ñ Ð² Ð²Ñ‹ÑÐ¾ÐºÐ¾Ðµ (Ð½Ð¾Ð¼Ð¸Ð½Ð°Ð»ÑŒÐ½Ð¾Ðµ Ð½Ð°Ð¿Ñ€ÑÐ¶ÐµÐ½Ð¸Ðµ 20 Ð’)", Package="PDIP-16 Texas Instruments", Check_prices=https://www.snapeda.com/parts/CD40109BE/Texas+Instruments/view-part/?ref=eda, MF="Texas Instruments", MP=CD40109BE, SnapEDA_Link=https://www.snapeda.com/parts/CD40109BE/Texas+Instruments/view-part/?ref=snap
U6: library part 74HC14D, "Inverter IC 6 Channel Schmitt Trigger 14-SOIC", Package="SO14-14 Nexperia USA Inc.", Availability="In Stock", Check_prices=https://www.snapeda.com/parts/74HC14D/Toshiba+Semiconductor+and+Storage/view-part/?ref=eda, MF=Toshiba, MP=74HC14D, Price=None, Purchase-URL=https://pricing.snapeda.com/search/part/74HC14D/?ref=eda, SnapEDA_Link=https://www.snapeda.com/parts/74HC14D/Toshiba+Semiconductor+and+Storage/view-part/?ref=snap
U7: "OR Controller Source Selector Switch P-Channel 2:1 20-QFN _4x4_", Package="QFN -20 Analog Devices", Availability=Unavailable, MF="Analog Devices", MP=LTC4418IUF#TRPBF, Price=None, SnapEDA_Link=https://www.snapeda.com/parts/LTC4418IUF%23TRPBF/Analog%20Devices/view-part/2882983/?ref=snap
VT1 VT2 VT3 VT4: "P MOSFET", Manufacturer=Infineon, Part Number=FDS6675BZ, Type=MOSFET, Сharacter=P

## Via types
v1: diameter 0.4, hole 0.3, Top Layer 1 to Bottom Layer 1, 22 vias
v2: diameter 0.6, hole 0.3, Top Layer 1 to Bottom Layer 1, 20 vias
v3: diameter 0.7, hole 0.3, Top Layer 1 to Bottom Layer 1, 4 vias

## Nets (pads, with @x,y where several pads share a name; then routed paths per layer and width w, separated by ;. In a path a pad name is that pad's centre, name@x,y a point inside that pad or via, vN(x,y) a via of type N, cw(c..) or ccw(c..) an arc to the next point about the centre after c; other vN are vias at no path point)
3.3V: C2.1 DA1.2 DA1.4 DD1.8 DD2.8 U6.14 | length 19.3
  Top Layer 1 w0.5: DA1.2 59.8,47.7 60.05,47.45 DA1.2@60.05,47.407 ; C2.1 65.45,43.1 65.65,42.9 65.85,42.9 67.761,40.989 v1(67.919,40.989) ; DD2.8 77.148,39.34 77.194,39.386 77.194,39.601 77.518,39.925 v1(79.25,39.925)
  VCC w0.5: v1(67.919,40.989) 78.186,40.989 v1(79.25,39.925)
5V: "RPI 4.2" "RPI 4.4" C1.1 C3.1 DA1.3 HL2.1 PS1.4 U2.1 U2.16 U4.1 U4.16 U5.1 U5.16 | length 4.2
  Top Layer 1 w0.254: v2(3.125,78.475) 3.125,78.381 3.3,78.206 HL2.1 ; v2(56.775,45.475) 56.812,45.438 57.412,45.438 C1.1@57.45,45.4
  Top Layer 1 w0.5: C1.1@57.45,45.4 DA1.3
12V: C4.1 HL1.1 PS2.4 PS2.6 | length 6.9
  Top Layer 1 w0.254: HL1.1 13.1,27.9 C4.1
D: 
"ethernet 1": ETH1.1 J1.A29 | length 87.1
  Bottom Layer 1 w0.254: ETH1.1 5.5,12.774 5.845,13.119 6.119,13.119 6.881,13.881 7.865,13.881 16.867,4.879 50.879,4.879 57.356,11.356 77.989,11.356 80.341,13.708 82.288,13.708 J1.A29
"ethernet 2": ETH2.1 J1.A30 | length 86.2
  Bottom Layer 1 w0.254: ETH2.1 5.5,9.528 5.845,9.873 6.173,9.873 6.619,10.319 6.619,10.365 7.154,10.9 7.7,10.9 7.719,10.881 7.865,10.881 14.883,3.863 51.3,3.863 57.777,10.34 77.989,10.34 78.845,9.484 79.501,9.484 82.709,12.692 82.925,12.692 82.933,12.7 J1.A30
"ethernet 3": ETH3.1 J1.A31 | length 84.9
  Bottom Layer 1 w0.254: ETH3.1 5.5,6.274 5.845,6.619 6.119,6.619 7.1,7.6 8.1,7.6 12.853,2.847 51.721,2.847 58.198,9.324 77.568,9.324 77.768,9.124 78.424,8.468 79.922,8.468 81.614,10.16 J1.A31
"ethernet 4": ETH4.1 J1.A32 | length 83.4
  Bottom Layer 1 w0.254: ETH4.1 5.5,3.058 5.845,3.403 6.127,3.403 7.224,4.5 9.018,4.5 11.687,1.831 52.142,1.831 58.619,8.308 77.148,8.308 78.256,7.2 83.061,7.2 83.481,7.62 J1.A32
"ethernet 5": ETH5.1 J1.B29 | length 86.9
  Bottom Layer 1 w0.254: ETH5.1 7.5,12.226 7.845,11.881 8.119,11.881 15.629,4.371 51.089,4.371 57.566,10.848 78.2,10.848 80.552,13.2 82.715,13.2 83.35,13.835 84.02,13.835 85.425,15.24 J1.B29
"ethernet 6": ETH6.1 J1.B30 | length 86.1
  Bottom Layer 1 w0.254: ETH6.1 7.5,9.226 7.845,8.881 8.119,8.881 13.645,3.355 51.51,3.355 57.987,9.832 77.779,9.832 77.979,9.632 78.635,8.976 79.711,8.976 82.3,11.565 85.225,11.565 J1.B30
"ethernet 7": ETH7.1 J1.B31 | length 84.3
  Bottom Layer 1 w0.254: ETH7.1 8.839,6 12.5,2.339 51.931,2.339 58.408,8.816 77.358,8.816 77.558,8.616 78.214,7.96 80.132,7.96 81.072,8.9 85.1,8.9 J1.B31
"ethernet 8": ETH8.1 J1.B32 | length 83.3
  Bottom Layer 1 w0.254: ETH8.1 9.8,3 11.477,1.323 52.352,1.323 58.829,7.8 76.937,7.8 78.252,6.485 84.29,6.485 85.425,7.62 J1.B32
GND: "RPI 4.6" "RPI 4.9" "RPI 4.14" "RPI 4.20" "RPI 4.25" "RPI 4.30" "RPI 4.34" "RPI 4.39" -.1 C1.2 C2.2 C3.2 C4.2 C5.2 C6.2 C7.2 C8.2 C9.2 C10.2 C11.2 C14.2 C15.2 DA1.1 DD1.5 DD2.5 J1.A1 J1.A2 J1.A3 J1.A4 J1.A5 J1.A6 J1.A7 J1.A8 J1.A9 J1.A10 PS1.2 PS1.3 PS1.5 PS2.2 PS2.3 PS2.5 R1.1 R2.1 R7.2 R10.2 R13.2 U1.1 U1.2 U1.3 U1.4 U1.5 U1.14 U1.23 U1.24 U1.25 U2.8 U4.8 U5.8 U6.7 U7.8 U7.21 | length 59.1
  Top Layer 1 w0.2: v2(56.6,46.4) C1.2 ; v2(57.7,50) DA1.1 ; v2(62.3,42.8) 63.05,42.8 63.077,42.827 63.21,42.827 63.55,43.168 C2.2 ; C6.2 68.023,55.7 68.219,55.896 68.219,56.002 68.234,56.017 68.234,56.183 v2(67.923,56.494) ; C7.2 68.122,48.35 68.318,48.154 68.318,47.982 68.825,47.475 68.825,47.445 69.151,47.119 v2(69.243,47.119) ; U6.7 74.221,46.49 v2(74.525,46.186) ; v2(76.275,57.446) 76.321,57.4 DD1.5 ; DD2.5 77.67,35.53 v2(78.2,35)
  Top Layer 1 w0.254: R1.1 2.85,28 3.423,27.427 3.423,27.377 7.3,23.5 C4.2 ; R2.1 7,78.175 v2(7.025,78.2)
  Bottom Layer 1 w0.2: v2(32,17.3) 32.441,16.859 32.441,16.278 U1.14 ; U1.23 U1.24 U1.25 39.021,20.521 v2(39,20.5) ; U1.5 U1.4 39,16.179 v2(39,14.9) 39.578,15.478 39.578,16.122 U1.3 U1.2 U1.1 ; v2(62.3,42.8) 62.6,43.1 C14.2 ; v2(64.306,53.225) 64.306,53.117 64.173,52.984 64.173,52.909 63.95,52.686 R13.2 63.95,50.85 64.2,50.6 64.25,50.6 64.4,50.45 C10.2 ; v2(65.845,58.42) 65.912,58.488 65.912,59.187 C15.2 ; v2(67.923,56.494) 68.3,56.117 68.3,55.65 68.15,55.5 C11.2 ; U7.21 U7.8 ; R10.2 79.175,52.15 80.675,53.65 80.675,55.483 80.514,55.643 79.244,55.643 79.083,55.804 77.691,55.804 77.396,55.509 77.396,55.425 76.971,55 R7.2 76.55,55.177 76.275,55.452 v2(76.275,57.446)
  other v1: 68.45,49.8 69.6,49.8 69.632,50.896 68.578,51.006
GPIO16: "RPI 4.36" J1.C14 U2.2 U2.7 U2.9 U2.15 U4.2 U4.7 U4.9 U4.15 U5.2 U5.7 U5.9 U5.15 | length 289.4
  Top Layer 1 w0.2: U2.2 24.43,5.83 25.3,6.7 26.353,6.7 26.407,6.754 29.713,6.754 30.6,5.867 30.6,5.793 31.487,4.906 36.026,4.906 U2.7 ; U4.15 27.383,33.17 28.307,34.094 36.693,34.094 37.497,33.29 37.663,33.29 38.467,34.094 39.233,34.094 40.157,33.17 U4.9 ; U2.9 41.1,12.16 U5.7
  Top Layer 1 w0.254: 10.925,63.36 12.215,64.65 13.774,64.65 13.794,64.63 14.38,64.63 14.725,64.975 14.725,67.2 42.325,94.8 88.525,94.8 90.8,92.525 90.8,55.24 J1.C14
  Bottom Layer 1 w0.2: U2.2 U2.15 ; U4.2 U4.15
  Bottom Layer 1 w0.254: 10.925,63.36 10.925,48.395 U4.15 ; U2.15 24.25,23.33 U4.2 ; U2.7 38.72,7.6 51.875,7.6 53.33,9.055 53.33,9.45 U5.9 48.1,9.62 U5.7 ; U4.9 41.39,27.77 U4.7 40.045,25.23 40.996,26.181 44.239,26.181 U5.2 U5.15
I2C1_SCL: "RPI 4.5" U1.26 | length 53.7
  VCC w0.254: v3(43.125,22.425) 43.21,22.51 43.487,22.51 43.9,22.923 43.9,27.843 47.611,31.554 47.611,63.886 48.782,65.057 48.782,65.662 49.02,65.9
  Bottom Layer 1 w0.254: U1.26 39.656,20.926 40.59,19.992 41.01,19.992 41.018,20 42.528,20 42.543,20.015 42.815,20.015 43.575,20.775 43.575,21.975 v3(43.125,22.425)
I2C1_SDA: "RPI 4.3" U1.27 | length 53.2
  VCC w0.254: v3(42.169,21.62) 43.871,21.62 44.221,21.97 44.221,22.526 44.408,22.713 44.408,27.633 50.429,33.654 50.429,64.769 51.56,65.9
  Bottom Layer 1 w0.254: U1.27 40.316,20.984 40.7,20.6 42.051,20.6 42.2,20.749 42.2,21.589 v3(42.169,21.62)
I2C2_SCL: "RPI 4.23" J1.C3 | length 70.1
  Top Layer 1 w0.254: 26.16,65.9 42.675,82.415 86.83,82.415 87.67,81.575 88.124,81.575 88.179,81.52 88.66,81.52 J1.C3
I2C2_SDA: "RPI 4.19" J1.C4 | length 64.8
  Top Layer 1 w0.254: 31.24,65.9 31.478,66.138 31.478,66.603 45.425,80.55 82.945,80.55 83.35,80.145 87.495,80.145 J1.C4
NetC6_1: C6.1 D1.A R3.2 U6.1 | length 7
  Top Layer 1 w0.2: R3.2 67.9,54.6 68.346,55.046 68.903,55.046 69.147,55.29 D1.A 71.28,54.11 U6.1
NetC7_1: C7.1 D2.A R4.2 U6.3 | length 9.6
  Top Layer 1 w0.2: R4.2 C7.1 68.586,46.85 68.972,46.465 69.514,46.465 69.897,46.848 69.897,47.389 69.793,47.493 69.793,48.068 D2.A 70.369,48.644 70.419,48.644 71.15,49.375 71.15,50.259 71.812,50.921 71.946,50.921 72.145,51.12 72.145,51.403 72.312,51.57 U6.3
NetC10_1: C10.1 U7.10 U7.18 U7.19 | length 32.1
  VCC w0.254: v1(65.5,54.2) 75.075,54.2 75.55,53.725 75.55,48.175 73.975,46.6 v1(71,46.6)
  Bottom Layer 1 w0.254: C10.1 C10.1@65.4,50.45 ; v1(65.5,54.2) 65.5,54.148 64.987,53.635 64.987,52.438 64.769,52.22 64.769,51.18 65.08,50.869 65.251,50.869 65.4,50.72 C10.1@65.4,50.45 ; C10.1@65.523,50.549 65.861,50.549 65.893,50.581 66.562,50.581 66.581,50.6 U7.18 ; C10.1@65.523,50.573 C10.1@65.4,50.45 ; C10.1@65.573,50.573 66.1,51.1 U7.19 ; v1(71,46.6) 71,46.64 71.035,46.674 U7.10
NetC11_1: C11.1 U7.1 | length 2
  Bottom Layer 1 w0.2: U7.1 C11.1
NetC12_2: C12.2 U7.11 VT1.4 VT2.4 | length 22.1
  Bottom Layer 1 w0.254: VT2.4 63.7,37.35 64.3,36.75 67.725,36.75 67.894,36.919 67.894,39.527 68.935,40.568 68.935,41.41 68.34,42.005 67.498,42.005 67.398,41.905 VT1.4 66.4,42.005 66.4,43.35 66.523,43.473 66.573,43.473 66.769,43.669 66.769,43.699 67.051,43.981 67.081,43.981 67.619,44.519 67.989,44.519 69.354,45.884 69.613,45.884 70.378,46.648 70.378,47.589 70.125,47.841 70.125,47.975 70.1,48 U7.11
NetC13_2: C13.2 U7.13 VT3.4 VT4.4 | length 36.2
  Bottom Layer 1 w0.254: VT4.4 66.409,65.405 66.238,65.576 66.238,66.212 65.55,66.9 61.399,66.9 61.25,66.751 61.25,62.175 62.001,61.424 62.928,61.424 62.941,61.436 63.488,61.436 63.5,61.424 C13.2 63.55,59.95 63.55,59.063 61.907,57.42 61.907,47.843 62.461,47.289 67.614,47.289 68.451,47.29 69.07,47.909 69.07,48.051 69.1,48.081 U7.13
NetC14_1: C14.1 U7.12 VT1.1 VT1.2 VT1.3 VT2.1 VT2.2 VT2.3 | length 10.9
  Bottom Layer 1 w0.2: 63.475,42.575 63.6,42.7 C14.1@63.6,43.45 ; C14.1 C14.1@63.6,43.45 ; U7.12 69.6,47.686 69.897,47.389 69.897,46.848 69.414,46.365 69.109,46.365 67.744,45 67.108,45 66.033,43.925 65.75,43.925 64.9,43.075 64.025,43.075 63.8,43.3 63.75,43.3 C14.1@63.6,43.45
NetC15_1: C15.1 U7.14 VT3.1 VT3.2 VT3.3 VT4.1 VT4.2 VT4.3 | length 20.1
  Bottom Layer 1 w0.2: 65.165,59.936 62.842,57.613 62.842,54.859 62.388,54.405 62.388,48.042 62.659,47.771 68.252,47.771 68.589,48.108 68.589,48.654 U7.14
NetDD1_1: DD1.1 SW1.2 | length 2.5
  Top Layer 1 w0.381: SW1.2 70.105,61.205 72.595,61.205 DD1.1
NetDD1_2: DD1.2 DD1.3 U6.2 | length 11.3
  Top Layer 1 w0.2: DD1.2 DD1.3 72.63,58.7 v2(74.7,58.7) ; U6.2 74.628,52.84 74.792,53.004 v2(74.869,53.004)
  GND w0.2: v2(74.7,58.7) 74.7,53.312 74.714,53.298 74.714,53.267 74.869,53.112 v2(74.869,53.004)
NetDD1_4: DD1.4 SW2.2 | length 2.6
  Top Layer 1 w0.381: SW2.2 DD1.4
NetDD2_1: DD2.1 SW3.2 | length 2.3
  Top Layer 1 w0.254: SW3.2 69.219,39.219 69.219,39.34 DD2.1
NetDD2_2: DD2.2 DD2.3 U6.4 | length 17.3
  Top Layer 1 w0.2: DD2.3 DD2.2 71.942,38.07 72.127,38.255 72.127,38.467 74.875,41.215 74.875,45.612 75.179,45.916 75.179,46.457 74.875,46.761 74.875,48.582 74.95,48.657 74.95,49.625 74.275,50.3 U6.4
NetDD2_4: DD2.4 SW4.2 | length 1.9
  Top Layer 1 w0.254: SW4.2 69.515,35.515 71.385,35.515 DD2.4
NetHL1_2: HL1.2 R1.2 | length 4.7
  Top Layer 1 w1: R1.2 5.1,30 5.2,29.9 HL1.2
NetHL2_2: HL2.2 R2.2 | length 3.7
  Top Layer 1 w0.254: HL2.2 6.973,74.9 R2.2
NetJ1_C15: "RPI 4.35" J1.C15 | length 136.6
  Top Layer 1 w0.254: 10.925,65.9 13.175,68.15 14.957,68.15 42.115,95.308 88.735,95.308 91.308,92.735 91.308,53.208 J1.C15
NetJ1_C16: "RPI 4.38" J1.C16 | length 145.5
  Top Layer 1 w0.254: 8.385,63.36 8.385,63.41 9.525,64.55 9.525,67.1 11.125,68.7 14.788,68.7 41.904,95.816 88.946,95.816 91.816,92.946 91.816,51.176 J1.C16
NetR7_1: R7.1 R8.2 U7.3 | length 12.1
  Bottom Layer 1 w0.254: U7.3 69.1,53.475 69.775,54.15 70.631,54.15 70.65,54.169 76.92,54.169 77.751,55 R7.1 79.55,55 R8.2
NetR8_1: R8.1 R9.2 U7.2 | length 15.6
  Bottom Layer 1 w0.2: U7.2 68.611,52.546 68.611,53.761 69.581,54.731 71.981,54.731 75.35,58.1 77.75,58.1 79.2,56.65 79.223,56.65 79.423,56.45 R8.1 R9.2
NetR11_1: R11.1 R12.2 U7.4 | length 13.5
  Bottom Layer 1 w0.2: U7.4 69.611,52.546 69.611,53.092 69.838,53.319 72.773,53.319 73.996,52.096 73.996,51.791 74.291,51.496 76.767,51.496 77.365,50.898 77.365,49.843 76.88,49.359 76.88,49.236 76.684,49.039 R11.1 76.471,48.95 R12.2
NetR13_1: R13.1 U7.20 | length 1.8
  Bottom Layer 1 w0.2: R13.1 65.55,51.6 U7.20
NetU1_6: U1.6 U2.3 | length 17.1
  Bottom Layer 1 w0.254: U2.3 30.648,9.688 34.213,9.688 37.901,13.376 37.901,14.408 37.7,14.609 U1.6
NetU1_7: U1.7 U2.6 | length 19.7
  Bottom Layer 1 w0.254: U2.6 41.51,12.93 41.51,17.094 41.287,17.318 37.364,17.318 37.11,17.064 37.11,16.245 U1.7
NetU1_8: U1.8 U2.10 | length 2.7
  Bottom Layer 1 w0.254: U1.8 36.405,14.315 U2.10
NetU1_9: U1.9 U2.14 | length 12.2
  Bottom Layer 1 w0.254: U2.14 27.741,12.819 34.804,12.819 35.77,13.785 U1.9
NetU1_10: U1.10 U4.3 | length 15.4
  Bottom Layer 1 w0.254: U4.3 28.69,18.575 32.183,15.082 34.784,15.082 35.058,15.356 35.058,16.149 U1.10
NetU1_11: U1.11 U4.6 | length 13.3
  Bottom Layer 1 w0.254: U1.11 34.449,17.951 32,20.4 32,21.107 31.96,21.148 31.96,23.26 32.979,24.279 34.164,24.279 35.115,25.23 U4.6
NetU1_12: U1.12 U4.10 | length 21
  Bottom Layer 1 w0.254: U1.12 33.814,17.786 31.452,20.148 31.452,23.952 32.819,25.319 32.819,25.624 33.7,26.505 33.7,28.02 U4.10
NetU1_13: U1.13 U4.14 | length 18.8
  Bottom Layer 1 w0.254: U4.14 28.69,26.575 29.641,25.624 29.641,21.259 30.944,19.956 30.944,19.938 33.103,17.779 33.103,16.251 U1.13
NetU1_15: U1.15 U5.3 | length 14.7
  Bottom Layer 1 w0.254: U1.15 32.569,22.093 32.569,22.775 32.595,22.8 32.595,22.936 33.258,23.6 44.28,23.6 U5.3
NetU1_16: U1.16 U5.6 | length 16.4
  Bottom Layer 1 w0.254: U1.16 33.153,20.447 35.1,18.5 35.8,18.5 36.487,17.813 37.141,17.813 37.154,17.826 41.497,17.826 41.51,17.813 42.447,17.813 U5.6
NetU1_17: U1.17 U5.10 | length 29.5
  Bottom Layer 1 w0.254: U1.17 33.814,20.786 35.592,19.008 36.01,19.008 36.697,18.321 36.931,18.321 36.944,18.334 41.708,18.334 41.72,18.321 50.219,18.321 50.69,18.792 53.293,18.792 54.451,17.634 54.451,13.111 U5.10
NetU1_18: U1.18 U5.14 | length 22.3
  Bottom Layer 1 w0.254: U1.18 34.449,21.249 36.182,19.516 36.221,19.516 36.895,18.842 41.918,18.842 41.931,18.829 50.009,18.829 U5.14
OUT1: J1.B1 TP9.1 | length 36.9
  VCC w0.254: v1(56.025,94.15) 59.11,94.15 66.9,86.36 82.215,86.36 83.35,85.225 84.29,85.225 85.425,86.36 J1.B1
  Bottom Layer 1 w0.254: TP9.1 55.2,93.309 56.025,94.134 v1(56.025,94.15)
OUT2: J1.B2 TP10.1 | length 41.7
  VCC w0.254: v1(54.35,89.956) 54.39,89.956 54.463,89.883 60.189,89.883 cw(c61.01,88.9) 61.831,89.883 62.659,89.883 62.733,89.809 68.722,83.82 82.215,83.82 83.35,82.685 84.29,82.685 85.425,83.82 J1.B2
  Bottom Layer 1 w0.254: TP10.1 49.7,91.125 50.869,89.956 v1(54.35,89.956)
OUT3: J1.B3 TP11.1 | length 47.9
  VCC w0.254: v1(46.275,89.375) 58.723,89.375 66.818,81.28 82.215,81.28 83.35,80.145 84.29,80.145 85.425,81.28 J1.B3
  Bottom Layer 1 w0.254: TP11.1 44.575,91.975 44.575,91.075 v1(46.275,89.375)
OUT4: J1.B4 TP12.1 | length 54.9
  VCC w0.254: v1(44.225,88.225) 44.253,88.253 44.356,88.253 58.388,88.253 61.541,85.101 61.615,85.027 62.291,84.351 62.291,83.349 66.9,78.74 82.215,78.74 83.35,77.605 84.29,77.605 85.425,78.74 J1.B4
  Bottom Layer 1 w0.254: TP12.1 38.95,91.372 42.097,88.225 v1(44.225,88.225)
OUT5: J1.B5 TP13.1 | length 61.3
  VCC w0.254: v1(54.675,86.825) 54.694,86.806 54.694,86.531 66.16,75.065 84.29,75.065 85.425,76.2 J1.B5
  Bottom Layer 1 w0.254: TP13.1 33.474,92.1 33.819,91.755 33.819,91.481 38.721,86.579 52.033,86.579 52.159,86.706 53.231,86.706 53.358,86.579 54.429,86.579 v1(54.675,86.825)
OUT6: J1.B6 TP14.1 | length 67.5
  VCC w0.254: v1(52.4,86.125) 53.55,86.125 66.015,73.66 82.215,73.66 83.35,72.525 84.29,72.525 85.425,73.66 J1.B6
  Bottom Layer 1 w0.254: TP14.1 27.974,92.1 28.319,91.755 28.319,91.481 33.749,86.051 52.286,86.051 52.36,86.125 v1(52.4,86.125)
OUT7: J1.B7 TP15.1 | length 43.5
  VCC w0.254: v1(52.4,84.9) 53.4,84.9 67.18,71.12 82.215,71.12 83.35,69.985 84.29,69.985 85.425,71.12 J1.B7
  Bottom Layer 1 w0.254: v1(52.4,84.9) 52.67,85.17 TP15.1
OUT8: J1.B8 TP16.1 | length 49.5
  VCC w0.254: v1(50.15,77.15) 51.326,75.974 52.981,75.974 60.375,68.58 82.215,68.58 83.35,67.445 84.29,67.445 85.425,68.58 J1.B8
  Bottom Layer 1 w0.254: TP16.1 49.704,85.17 49.36,84.825 49.36,84.551 49.325,84.516 49.325,77.975 v1(50.15,77.15)
OUT9: J1.B9 TP17.1 | length 53.5
  VCC w0.254: v1(48.875,76.1) 49.509,75.466 52.771,75.466 62.197,66.04 82.215,66.04 83.35,64.905 84.29,64.905 85.425,66.04 J1.B9
  Bottom Layer 1 w0.254: TP17.1 44.478,82.171 48.817,77.833 48.817,77.765 48.875,77.707 v1(48.875,76.1)
OUT10: J1.B10 TP18.1 | length 61.1
  VCC w0.254: v1(47.4,75.425) 47.867,74.958 52.56,74.958 64.018,63.5 82.215,63.5 83.35,62.365 84.29,62.365 85.425,63.5 J1.B10
  Bottom Layer 1 w0.254: TP18.1 38.729,80.746 41.799,77.676 46.77,77.676 47.4,77.046 v1(47.4,75.425)
OUT11: J1.B11 TP19.1 | length 65.9
  VCC w0.254: v1(45.9,74.45) 52.35,74.45 65.84,60.96 82.215,60.96 83.35,59.825 84.29,59.825 85.425,60.96 J1.B11
  Bottom Layer 1 w0.254: TP19.1 33.229,82.171 40.95,74.45 v1(45.9,74.45)
OUT12: J1.B12 TP20.1 | length 72
  VCC w0.254: v1(44.05,73.775) 51.453,73.775 66.808,58.42 74.017,58.42 74.418,58.019 74.982,58.019 75.407,58.444 82.191,58.444 83.35,57.285 84.29,57.285 85.425,58.42 J1.B12
  Bottom Layer 1 w0.254: TP20.1 27.229,84.271 37.725,73.775 v1(44.05,73.775)
PWM1: J1.C31 U2.4 | length 65
  Top Layer 1 w0.2: U2.4 32.922,2.238 77.937,2.238 80.649,4.95 80.649,6.016 83.361,8.728 87.468,8.728 J1.C31
PWM2: J1.C30 U2.5 | length 59.9
  Top Layer 1 w0.2: U2.5 34.54,8.5 78.042,8.5 80.81,11.268 87.468,11.268 J1.C30
PWM3: J1.C28 U2.11 | length 58.4
  Top Layer 1 w0.2: U2.11 37.126,11.054 76.169,11.054 81.615,16.5 87.62,16.5 J1.C28
PWM4: J1.C29 U2.13 | length 62.8
  Top Layer 1 w0.2: U2.13 32.5,10.6 79.5,10.6 82.9,14 86.687,14 87.927,15.24 J1.C29
PWM5: J1.B23 U4.4 | length 58.2
  Top Layer 1 w0.2: U4.4 32.154,26.154 35.285,26.154 38.785,29.654 77.754,29.654 79.688,31.588 84.279,31.588 85.387,30.48 J1.B23
PWM6: J1.B24 U4.5 | length 54.8
  Top Layer 1 w0.2: U4.5 35.003,25.23 38.973,29.2 84.127,29.2 85.387,27.94 J1.B24
PWM7: J1.C22 U4.11 | length 58.9
  Top Layer 1 w0.2: U4.11 36.485,32.995 36.485,32.515 38.438,30.562 76.862,30.562 82.774,36.474 82.854,36.474 83.08,36.7 86.787,36.7 87.468,36.019 87.468,34.452 J1.C22
PWM8: J1.C23 U4.13 | length 64.5
  Top Layer 1 w0.2: U4.13 36.076,28.324 36.813,28.324 38.597,30.108 77.566,30.108 81.586,34.128 86.819,34.128 87.792,33.155 87.792,32.561 88.9,31.453 J1.C23
PWM9: J1.C25 U5.4 | length 51.8
  Top Layer 1 w0.2: U5.4 52.193,19.78 53.809,18.164 53.883,18.164 59.631,12.416 71.809,12.416 83.361,23.968 87.468,23.968 J1.C25
PWM10: J1.C26 U5.5 | length 50
  Top Layer 1 w0.2: U5.5 52.193,17.24 53.117,16.316 54.384,16.316 58.738,11.962 73.81,11.962 83.6,21.752 86.819,21.752 87.927,22.86 J1.C26
PWM11: J1.C27 U5.11 | length 40.4
  Top Layer 1 w0.2: U5.11 54.9,14.7 58.092,11.508 75.981,11.508 83.361,18.888 87.468,18.888 J1.C27
PWM12: J1.C24 U5.13 | length 43.6
  Top Layer 1 w0.2: U5.13 54.62,19.78 60.4,14 70.853,14 83.361,26.508 87.468,26.508 J1.C24
RS485_2_N: DD2.7 R6.1 | length 3
  Top Layer 1 w0.2: DD2.7 77.067,38.07 77.333,37.804 77.333,37.779 77.45,37.662 78.162,37.662 78.65,38.15 R6.1 78.879,38.15 R6.1@79.075,37.954
RS485_2_P: DD2.6 R6.2 | length 3.1
  Top Layer 1 w0.2: DD2.6 77.067,36.8 77.333,37.066 77.333,37.091 77.45,37.208 78.092,37.208 78.65,36.65 R6.2 78.879,36.65 R6.2@79.075,36.846
RS485_N: DD1.7 J1.A28 R5.1 | length 49.4
  Top Layer 1 w0.381: DD1.7 78.39,59.94 78.713,59.618 79.217,59.618 79.441,59.841 79.441,59.941 79.55,60.05 R5.1 79.85,60.05 79.96,59.941 79.96,59.876 80.183,59.653 81.34,59.653 81.935,59.058 81.935,57.835 80.904,56.804 v3(80.904,56.753)
  GND w0.381: v3(80.904,56.753) 80.939,56.753 80.986,56.8 81.146,56.959 81.695,56.959 81.918,56.736 81.918,56.421 81.665,56.168 81.665,19.104 82.037,18.732 82.867,18.732 J1.A28
RS485_P: DD1.6 J1.A27 R5.2 | length 47.5
  Top Layer 1 w0.381: DD1.6 78.395,58.67 78.708,58.983 79.217,58.983 79.441,58.759 79.441,58.66 79.55,58.55 R5.2 79.85,58.55 79.96,58.66 79.96,58.759 80.218,59.018 81.077,59.018 81.3,58.794 81.3,58.39 80.654,57.744 v3(80.654,57.713)
  GND w0.381: v3(80.654,57.713) 80.654,57.682 80.684,57.652 80.936,57.652 80.993,57.594 81.958,57.594 82.553,56.999 82.553,56.158 82.3,55.905 82.3,19.367 82.867,19.367 J1.A27
S: 
UART0_RX: "RPI 4.10" SW1.1 | length 25.7
  Top Layer 1 w0.254: 43.94,63.36 46.1,61.2 SW1.1
UART0_TX: "RPI 4.8" D1.K R3.1 SW2.1 | length 43.4
  Top Layer 1 w0.254: 46.48,63.36 45.539,63.36 44.13,64.769 42.944,64.769 42.63,64.455 42.63,64.245 42.675,64.2 42.675,61.975 47.25,57.4 67.45,57.4 ; SW2.1 67.45,57.4 ; D1.K 69.91,51.75 R3.1 67.762,51.75 67.591,51.921 67.591,52.059 67.069,52.581 67.069,57.019 67.45,57.4
UART2_RX: "RPI 4.28" SW3.1 | length 61.9
  Top Layer 1 w0.254: 21.085,63.36 21.085,54.483 33.932,41.636 54.582,41.636 57.018,39.2 SW3.1
UART2_TX: "RPI 4.27" D2.K R4.1 SW4.1 | length 133.1
  Top Layer 1 w0.2: R4.1 68,44.75 68.175,44.925 D2.K
  Top Layer 1 w0.254: v1(52.925,47.35) 38.036,47.35 22.452,62.934 22.452,63.593 21.747,64.297 21.085,64.959 21.085,65.9 19.954,64.769 19.954,54.896 39.35,35.5 SW4.1 ; D2.K 70.725,44.2 v1(70.725,43.2)
  VCC w0.254: v1(52.925,47.35) 60.85,47.35 66.2,42 69.525,42 v1(70.725,43.2)
UART3_RX: "RPI 4.7" J1.C5 | length 52.2
  Top Layer 1 w0.254: 46.48,65.9 50.38,69.8 90.151,69.8 90.151,74.949 J1.C5
UART3_TX: "RPI 4.29" J1.C6 | length 78.7
  Top Layer 1 w0.254: 18.545,65.9 20.77,68.125 24.772,68.125 24.921,67.976 24.921,64.918 25.07,64.769 34.248,64.769 35.05,65.571 35.05,66.525 39.325,70.8 81.895,70.8 83.35,72.255 86.56,72.255 87.495,73.19 87.495,73.245 87.91,73.66 J1.C6
"V AKB": C9.1 J1.A11 J1.A12 J1.A13 J1.A14 J1.A15 J1.A16 J1.A17 J1.A18 J1.A19 J1.A20 R9.1 U7.17 VT4.5 VT4.6 VT4.7 VT4.8 | length 15.9
  Bottom Layer 1 w0.2: U7.17 66.092,50.1 65.738,49.746 64.705,49.746 64.062,49.746 63.296,50.512 63.296,53.946 66.375,57.025 68.45,59.1 ; 71.217,61.112 71.217,61.399 71.413,61.595 VT4.8
"V bat": C5.1 C12.1 C13.1 PS1.1 PS2.1 R10.1 R11.2 U7.5 U7.15 VT2.5 VT2.6 VT2.7 VT2.8 VT3.5 VT3.6 VT3.7 VT3.8 | length 83.8
  Bottom Layer 1 w0.2: VT2.6 59.485,39.365 63,35.85 68.258,35.85 68.375,35.967 68.375,39.328 69.416,40.369 69.416,41.609 68.539,42.486 68.039,42.486 67.55,42.975 67.55,43.15 C12.1 67.4,43.35 67.55,43.5 67.65,43.5 68.05,43.9 70.026,43.9 70.315,44.189 71.135,44.189 71.424,43.9 73.258,43.9 73.375,44.017 73.375,49.348 R10.1@74.677,50.65 ; 63.725,68.55 66.4,68.55 67.825,67.125 67.825,59.2 62.842,54.217 62.842,48.342 62.959,48.225 67.66,48.225 67.815,48.38 68.065,48.38 68.1,48.415 U7.15 ; U7.5 72.915,52.535 73.542,51.908 73.542,51.603 74.103,51.042 74.408,51.042 74.481,50.969 74.481,50.846 R10.1@74.677,50.65 ; R11.2 74.911,50.539 R10.1 R10.1@74.677,50.65
  Bottom Layer 1 w0.254: PS2.1 54.42,55.52 59.491,60.591 59.701,60.591 59.85,60.442 59.85,60.3 60.15,60 C13.1
"V res": +.1 C8.1 R12.1 U7.16 VT1.5 VT1.6 VT1.7 VT1.8 | length 38.4
  VCC w0.254: v2(64.018,49.093) 64.049,49.063 64.049,48.401 v2(69.25,43.2)
  Bottom Layer 1 w0.254: v2(64.018,49.093) 64.049,49.124 66.124,49.124 66.594,49.594 66.602,49.594 66.608,49.6 U7.16 ; v2(69.25,43.2) 69.35,43.1 69.35,42.355 69.515,42.19 ; R12.1 75,46.674 75.206,46.469 75.206,45.904 75,45.699 75,22.872 75.5,22.372 C8.1
pads on no net: "RPI 4.1" "RPI 4.11" "RPI 4.12" "RPI 4.13" "RPI 4.15" "RPI 4.16" "RPI 4.17" "RPI 4.18" "RPI 4.21" "RPI 4.22" "RPI 4.24" "RPI 4.26" "RPI 4.31" "RPI 4.32" "RPI 4.33" "RPI 4.37" "RPI 4.40" J1.A21 J1.A22 J1.A23 J1.A24 J1.A25 J1.A26 J1.B13 J1.B14 J1.B15 J1.B16 J1.B17 J1.B18 J1.B19 J1.B20 J1.B21 J1.B22 J1.B25 J1.B26 J1.B27 J1.B28 J1.C1 J1.C2 J1.C7 J1.C8 J1.C9 J1.C10 J1.C11 J1.C12 J1.C13 J1.C17 J1.C18 J1.C19 J1.C20 J1.C21 J1.C32 J1.SH1 J1.SH2 PS1.6 U1.19 U1.20 U1.21 U1.22 U1.28 U2.12 U4.12 U5.12 U6.5 U6.6 U6.8 U6.9 U6.10 U6.11 U6.12 U6.13 U7.6 U7.7 U7.9

## Polygon pours and split planes (outlines as drawn)
5V on VCC "NONET_L-01_P-001" (solid, pour order 9): 0.075,96.5 0.075,60.625 16.875,60.625 16.875,-0.05 16.8,-0.125 60.5,-0.125 60.5,46.125 60.1,45.725 55.65,45.725 55.65,84.05 43.225,96.475
12V on VCC "NONET_L-01_P-001" (solid, pour order 10): -0.075,0.05 0.025,-0.05 16.875,-0.05 16.875,60.625 0.075,60.625
GND on GND "NONET_L-01_P-001" (solid, pour order 8): 92.329,23.375 74.125,23.375 74.125,22.725 74.125,-0.02 0,0 0,96.525 92.35,96.525 92.329,96.504
"V res" on GND "NONET_L-01_P-001" (solid, pour order 15): 74.125,23.375 81.212,23.375 81.125,23.288 81.125,0.025 74.17,0.025 74.125,-0.02
"V AKB" on Bottom Layer 1 "NONET_L-01_P-001" (solid, pour order 19): 64.275,83.3 64.5,83.075 92.3,83.075 92.35,83.025 92.325,83 92.325,36.575 82.166,36.575 82.166,42.725 65.186,42.725
"V bat" on Bottom Layer 1 "NONET_L-01_P-001" (solid, pour order 11): 60.275,30.9 60.4,31.025 60.4,67.675 63.9,67.675 63.9,93.55 56.825,93.55 56.65,93.375 56.65,83.675 51.175,83.675 50.05,83.675 50.275,30.764
NetC14_1 on Bottom Layer 1 "NONET_L-01_P-001" (solid, pour order 12): 62.2,38.65 62.275,38.575 64.675,38.575 64.675,37.4 67.5,37.4 67.5,41.325 67.45,41.375 65.25,41.375 65.25,43.85 62.2,43.85
"V res" on Bottom Layer 1 "NONET_L-01_P-001" (solid, pour order 13): 68.425,42.5 68.425,23.95 73.6,23.95 73.6,19.425 81.5,19.425 81.5,42.475 81.525,42.5
"V bat" on Bottom Layer 1 "NONET_L-01_P-001" (solid, pour order 18): 63.9,83.8 72.975,83.8 72.8,83.975 72.8,93.55 63.9,93.55
NetC15_1 on Bottom Layer 1 "NONET_L-01_P-001" (solid, pour order 17): 64.725,59.725 67.6,59.725 67.625,59.7 67.625,64.825 65.25,64.825 65.2,64.875 65.2,66.5 62.275,66.5 62.25,66.525 62.2,66.475 62.2,62.125 64.45,62.125 64.7,61.875 64.7,59.723
3.3V on Top Layer 1 "NONET_L-01_P-001" (solid, pour order 7): 56.4,30.95 82.8,30.95 82.8,63.1 56.4,63.1

## Silkscreen, mask and mechanical layers (free items; w line width, h text height)
Top Overlay:
  text "12B" at 25.654,49.854 h1.52
Mechanical 1:
  lines w0.254: 0.127,-6.604 0.127,95.25

## Dimensions
0.127,-6.604 to 92.329,0 on Mechanical 1